# Altium PCB PCB3.PcbDoc (part 1 of 2)
Units mm, origin at the board's own origin, x right, y up, seen from the top; angles counter-clockwise.
Board outline 100 x 100 mm, 4 copper layers (Top Layer, Inner Top Layer, Inner Bottom Layer, Bottom Layer), stack 1.64 mm thick; 201 components, 196 nets, 716 pads, 122 vias.
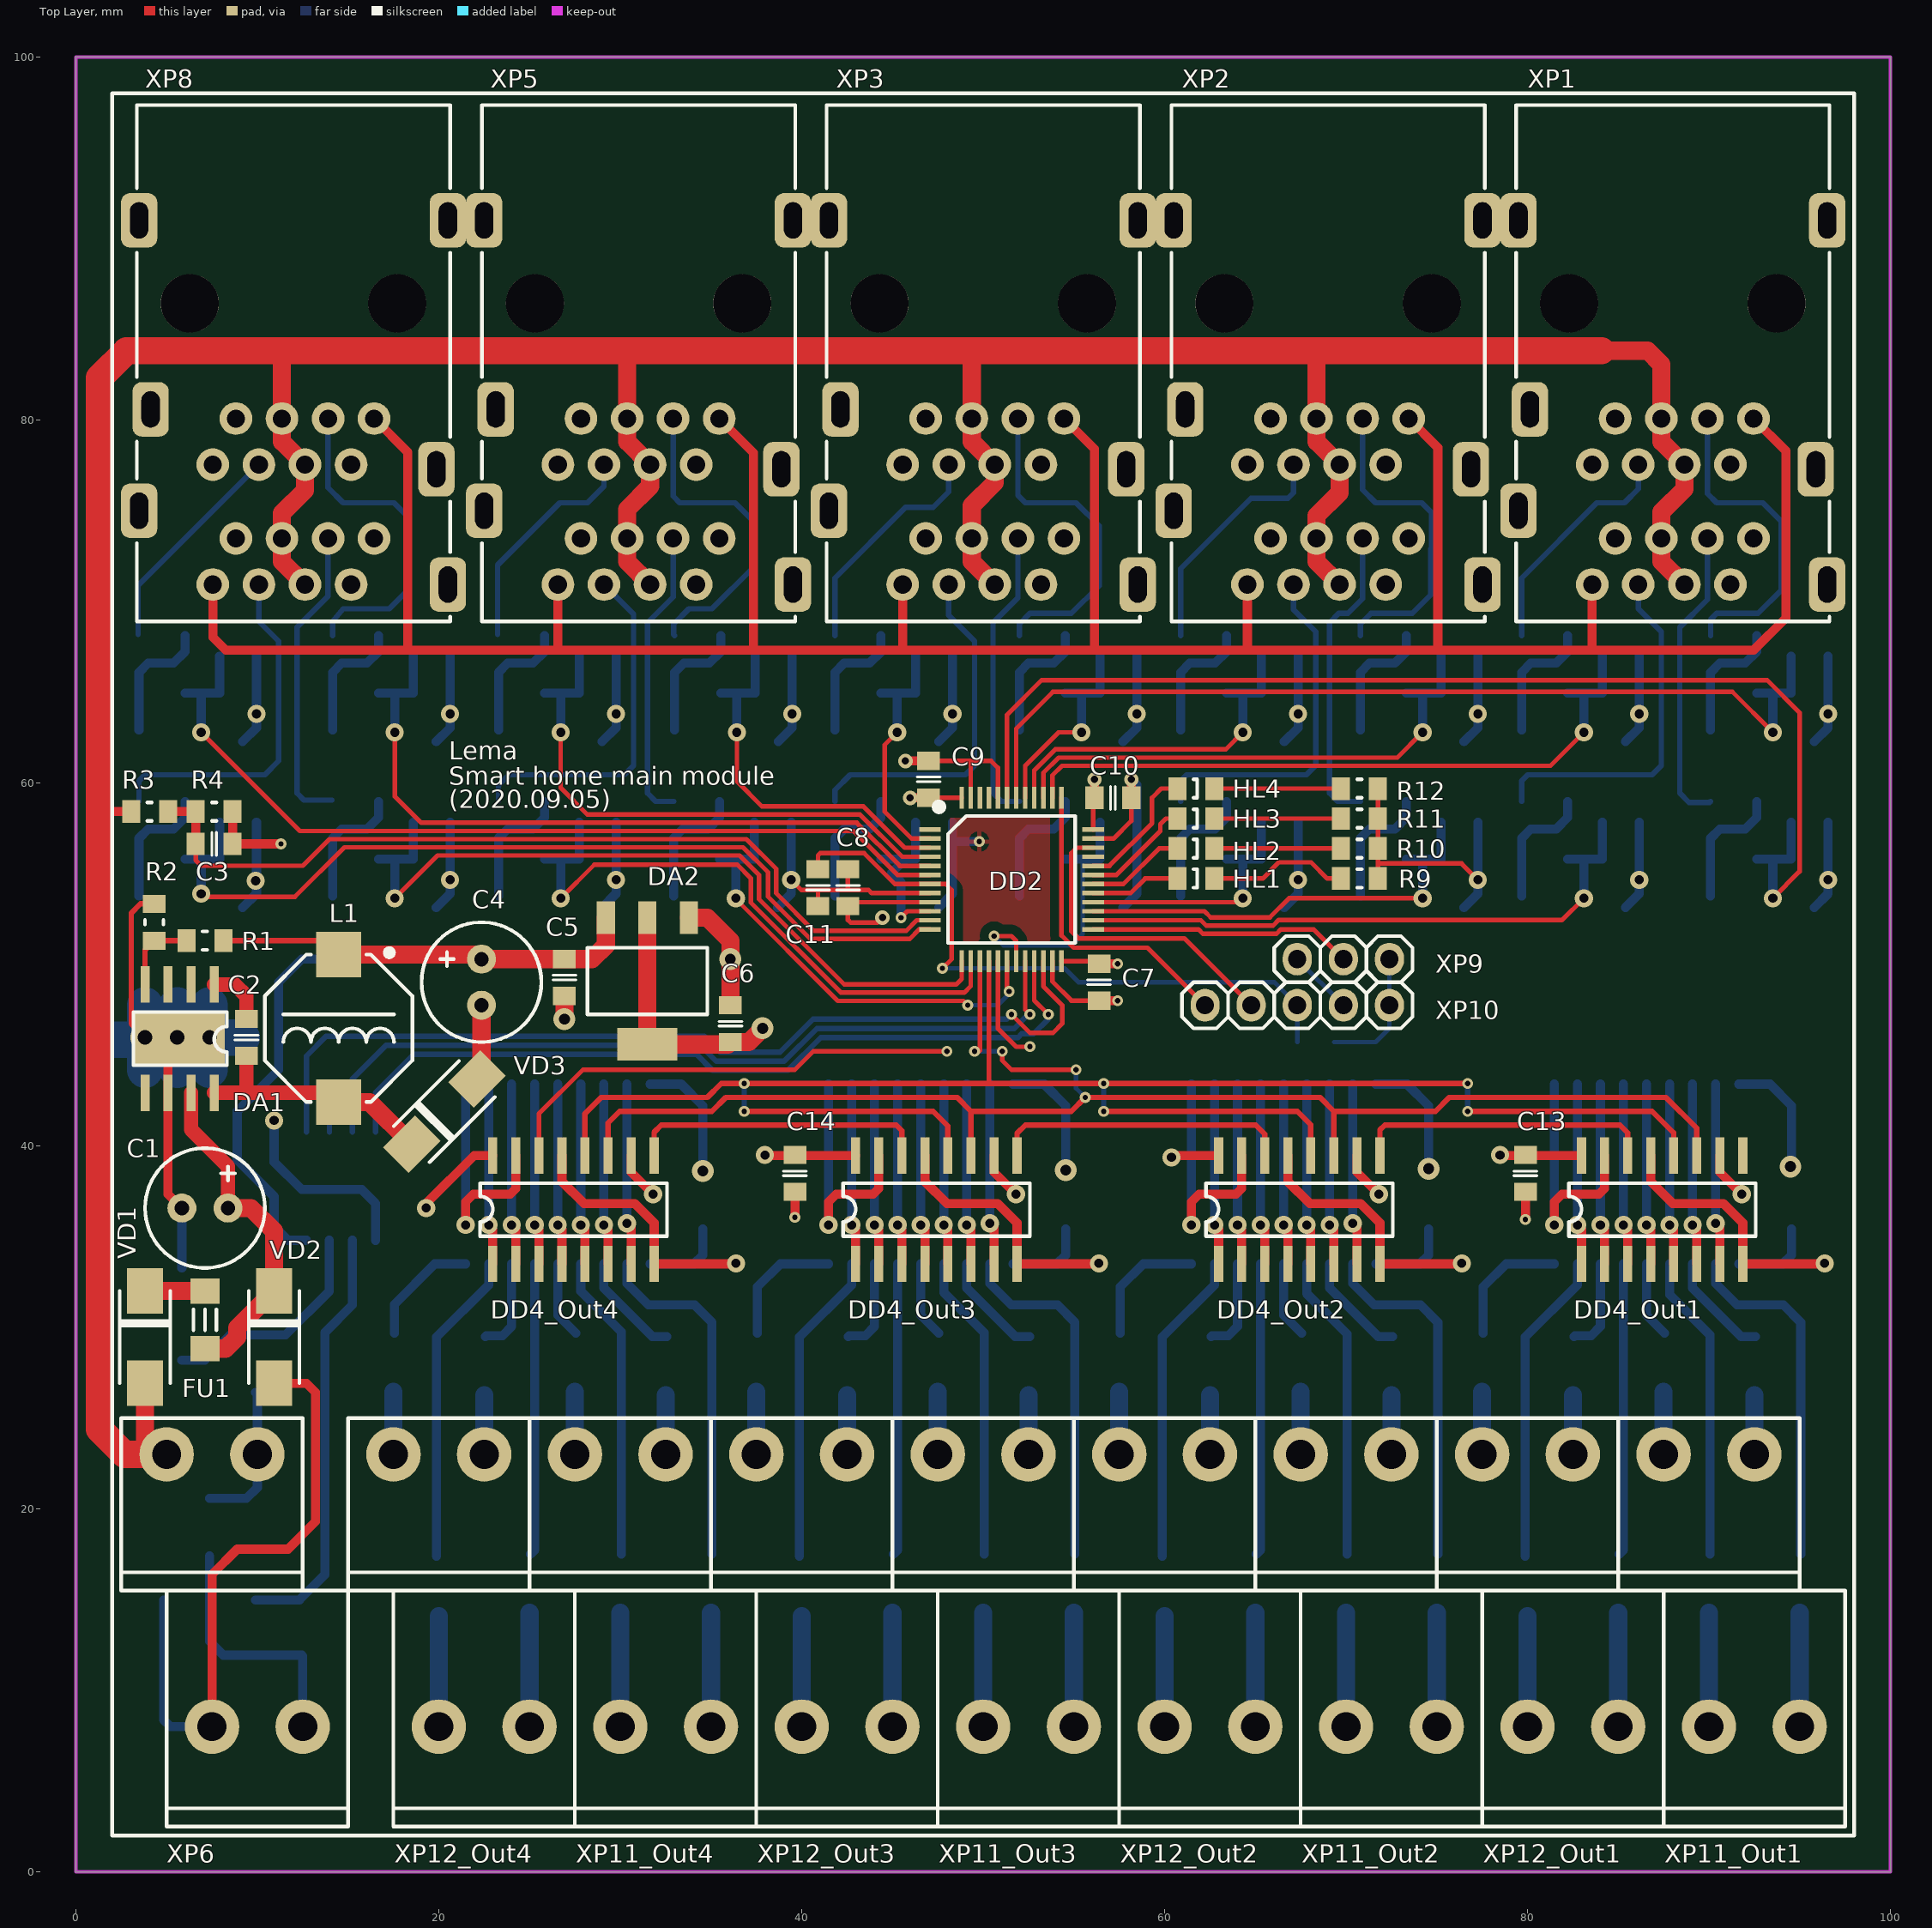
[diagram p0: Top Layer view]
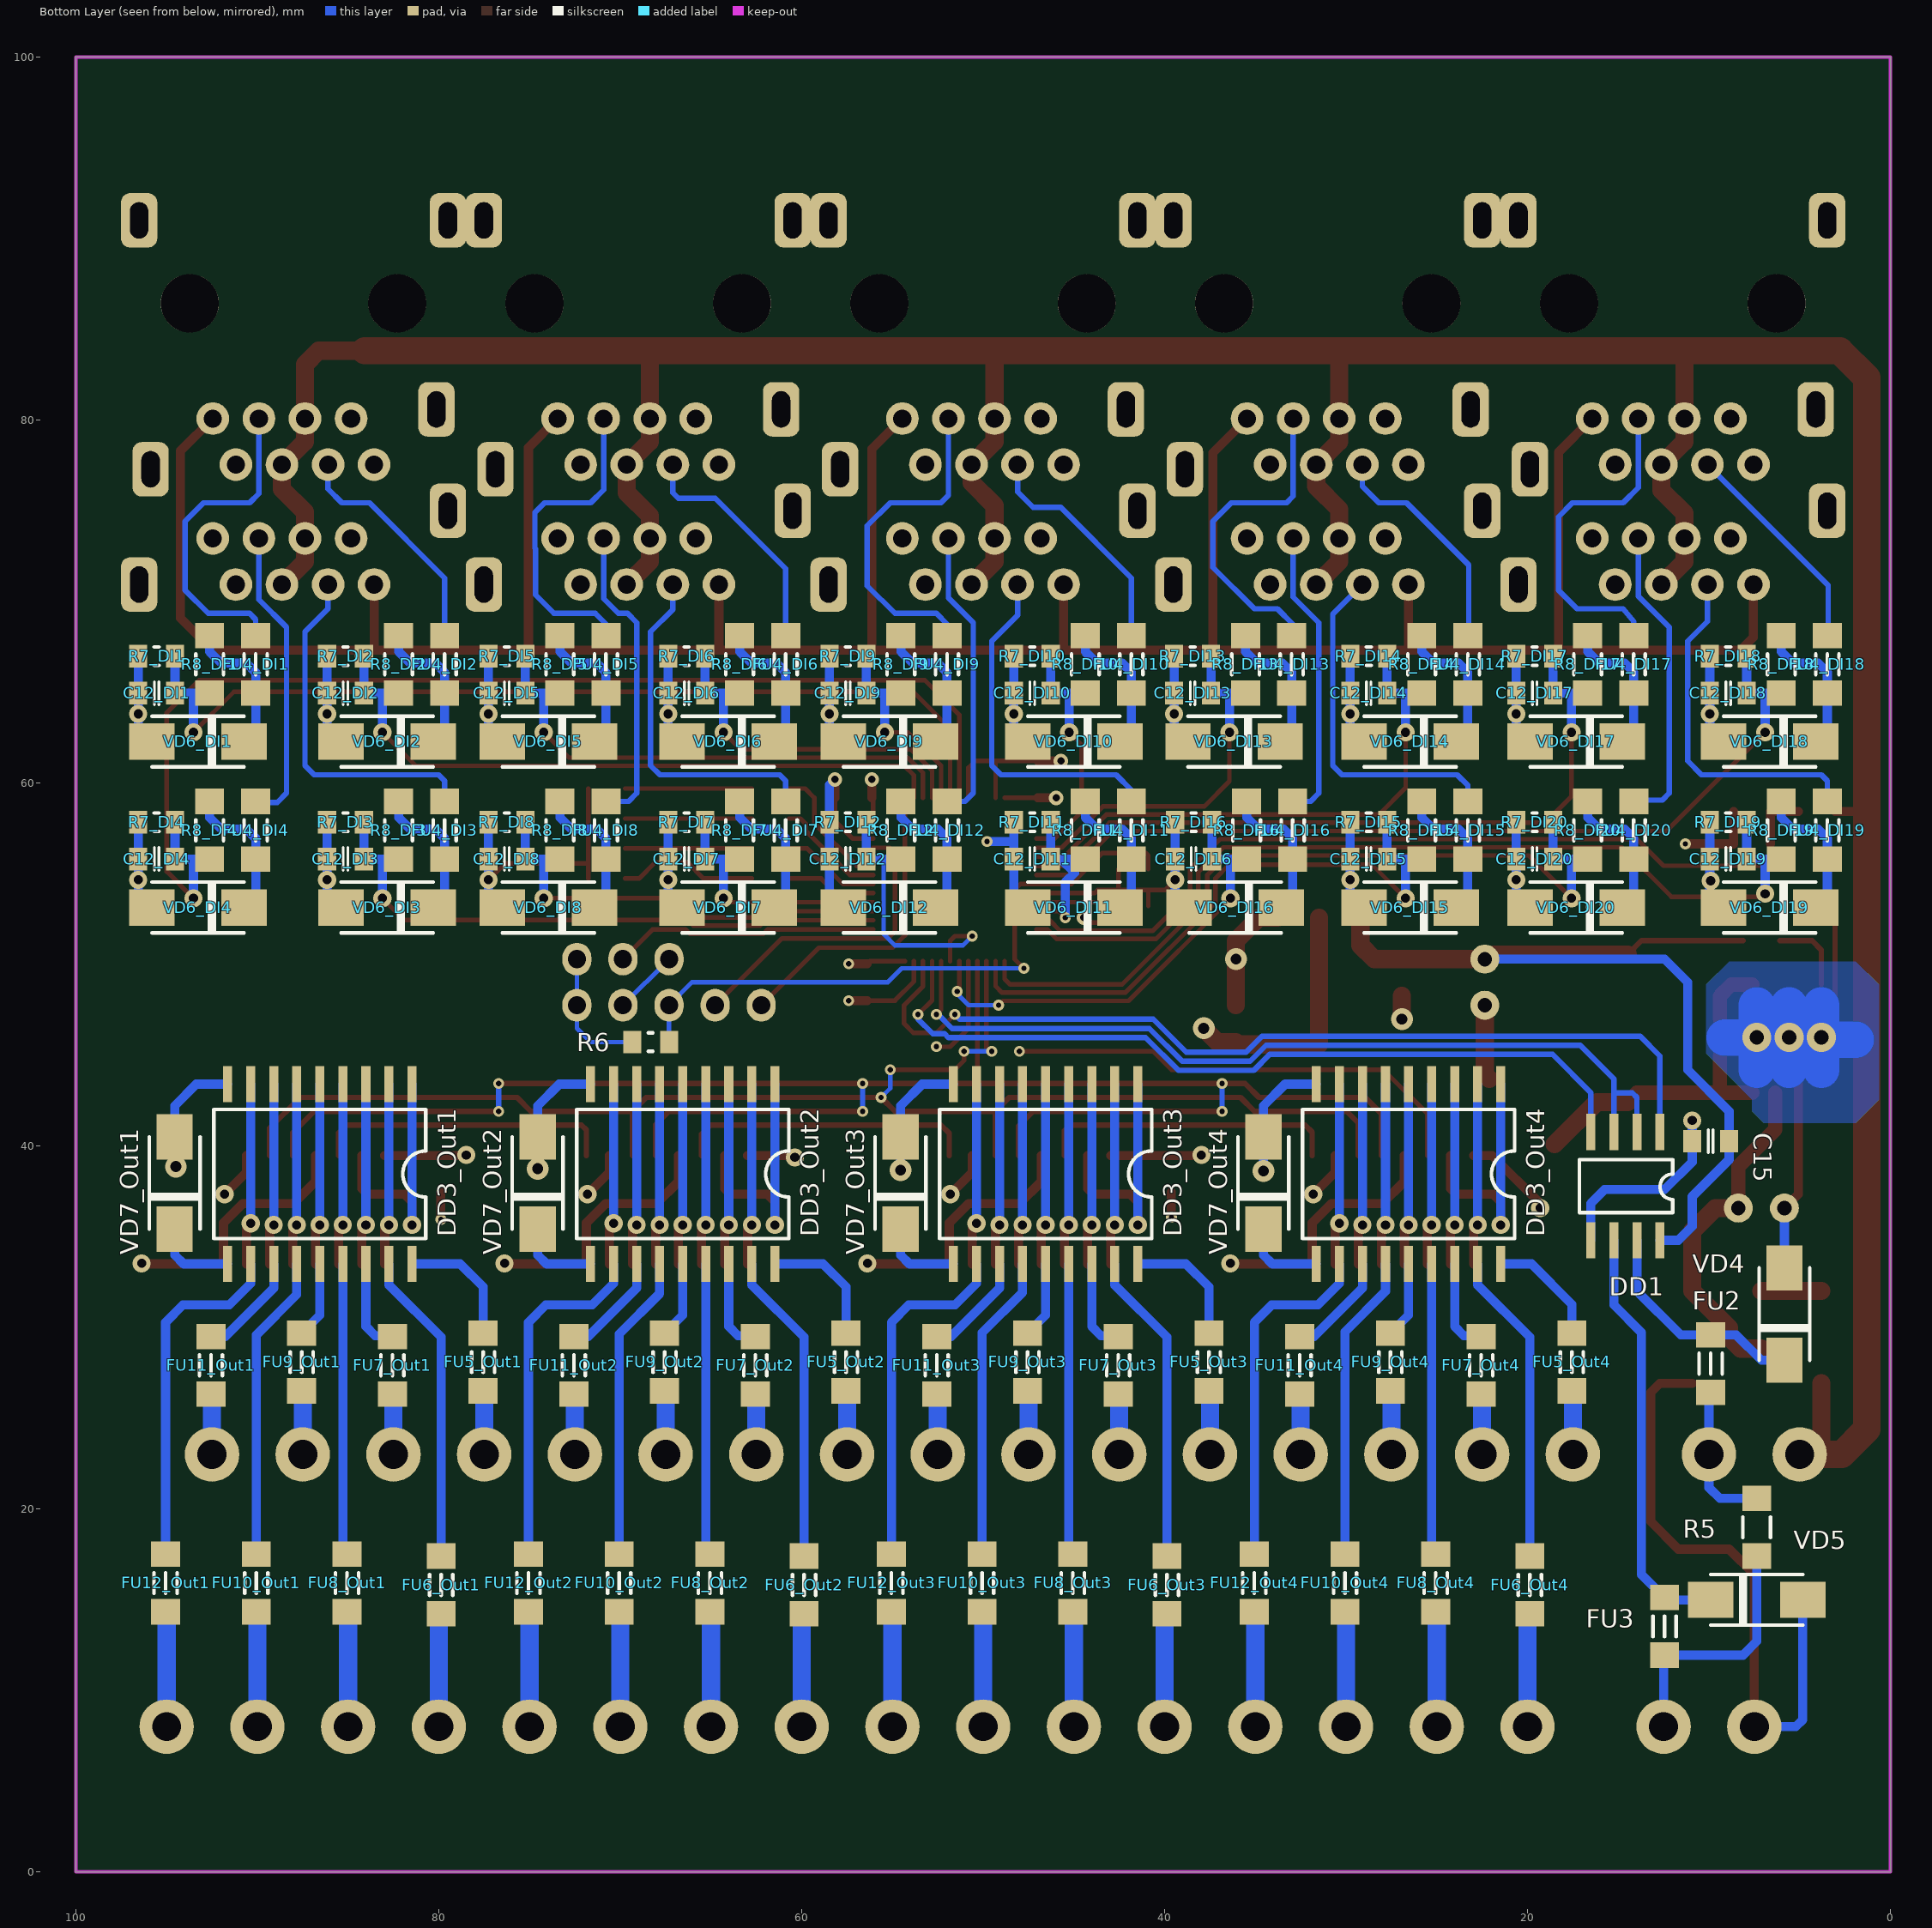
[diagram p1: Bottom Layer view, seen from below]
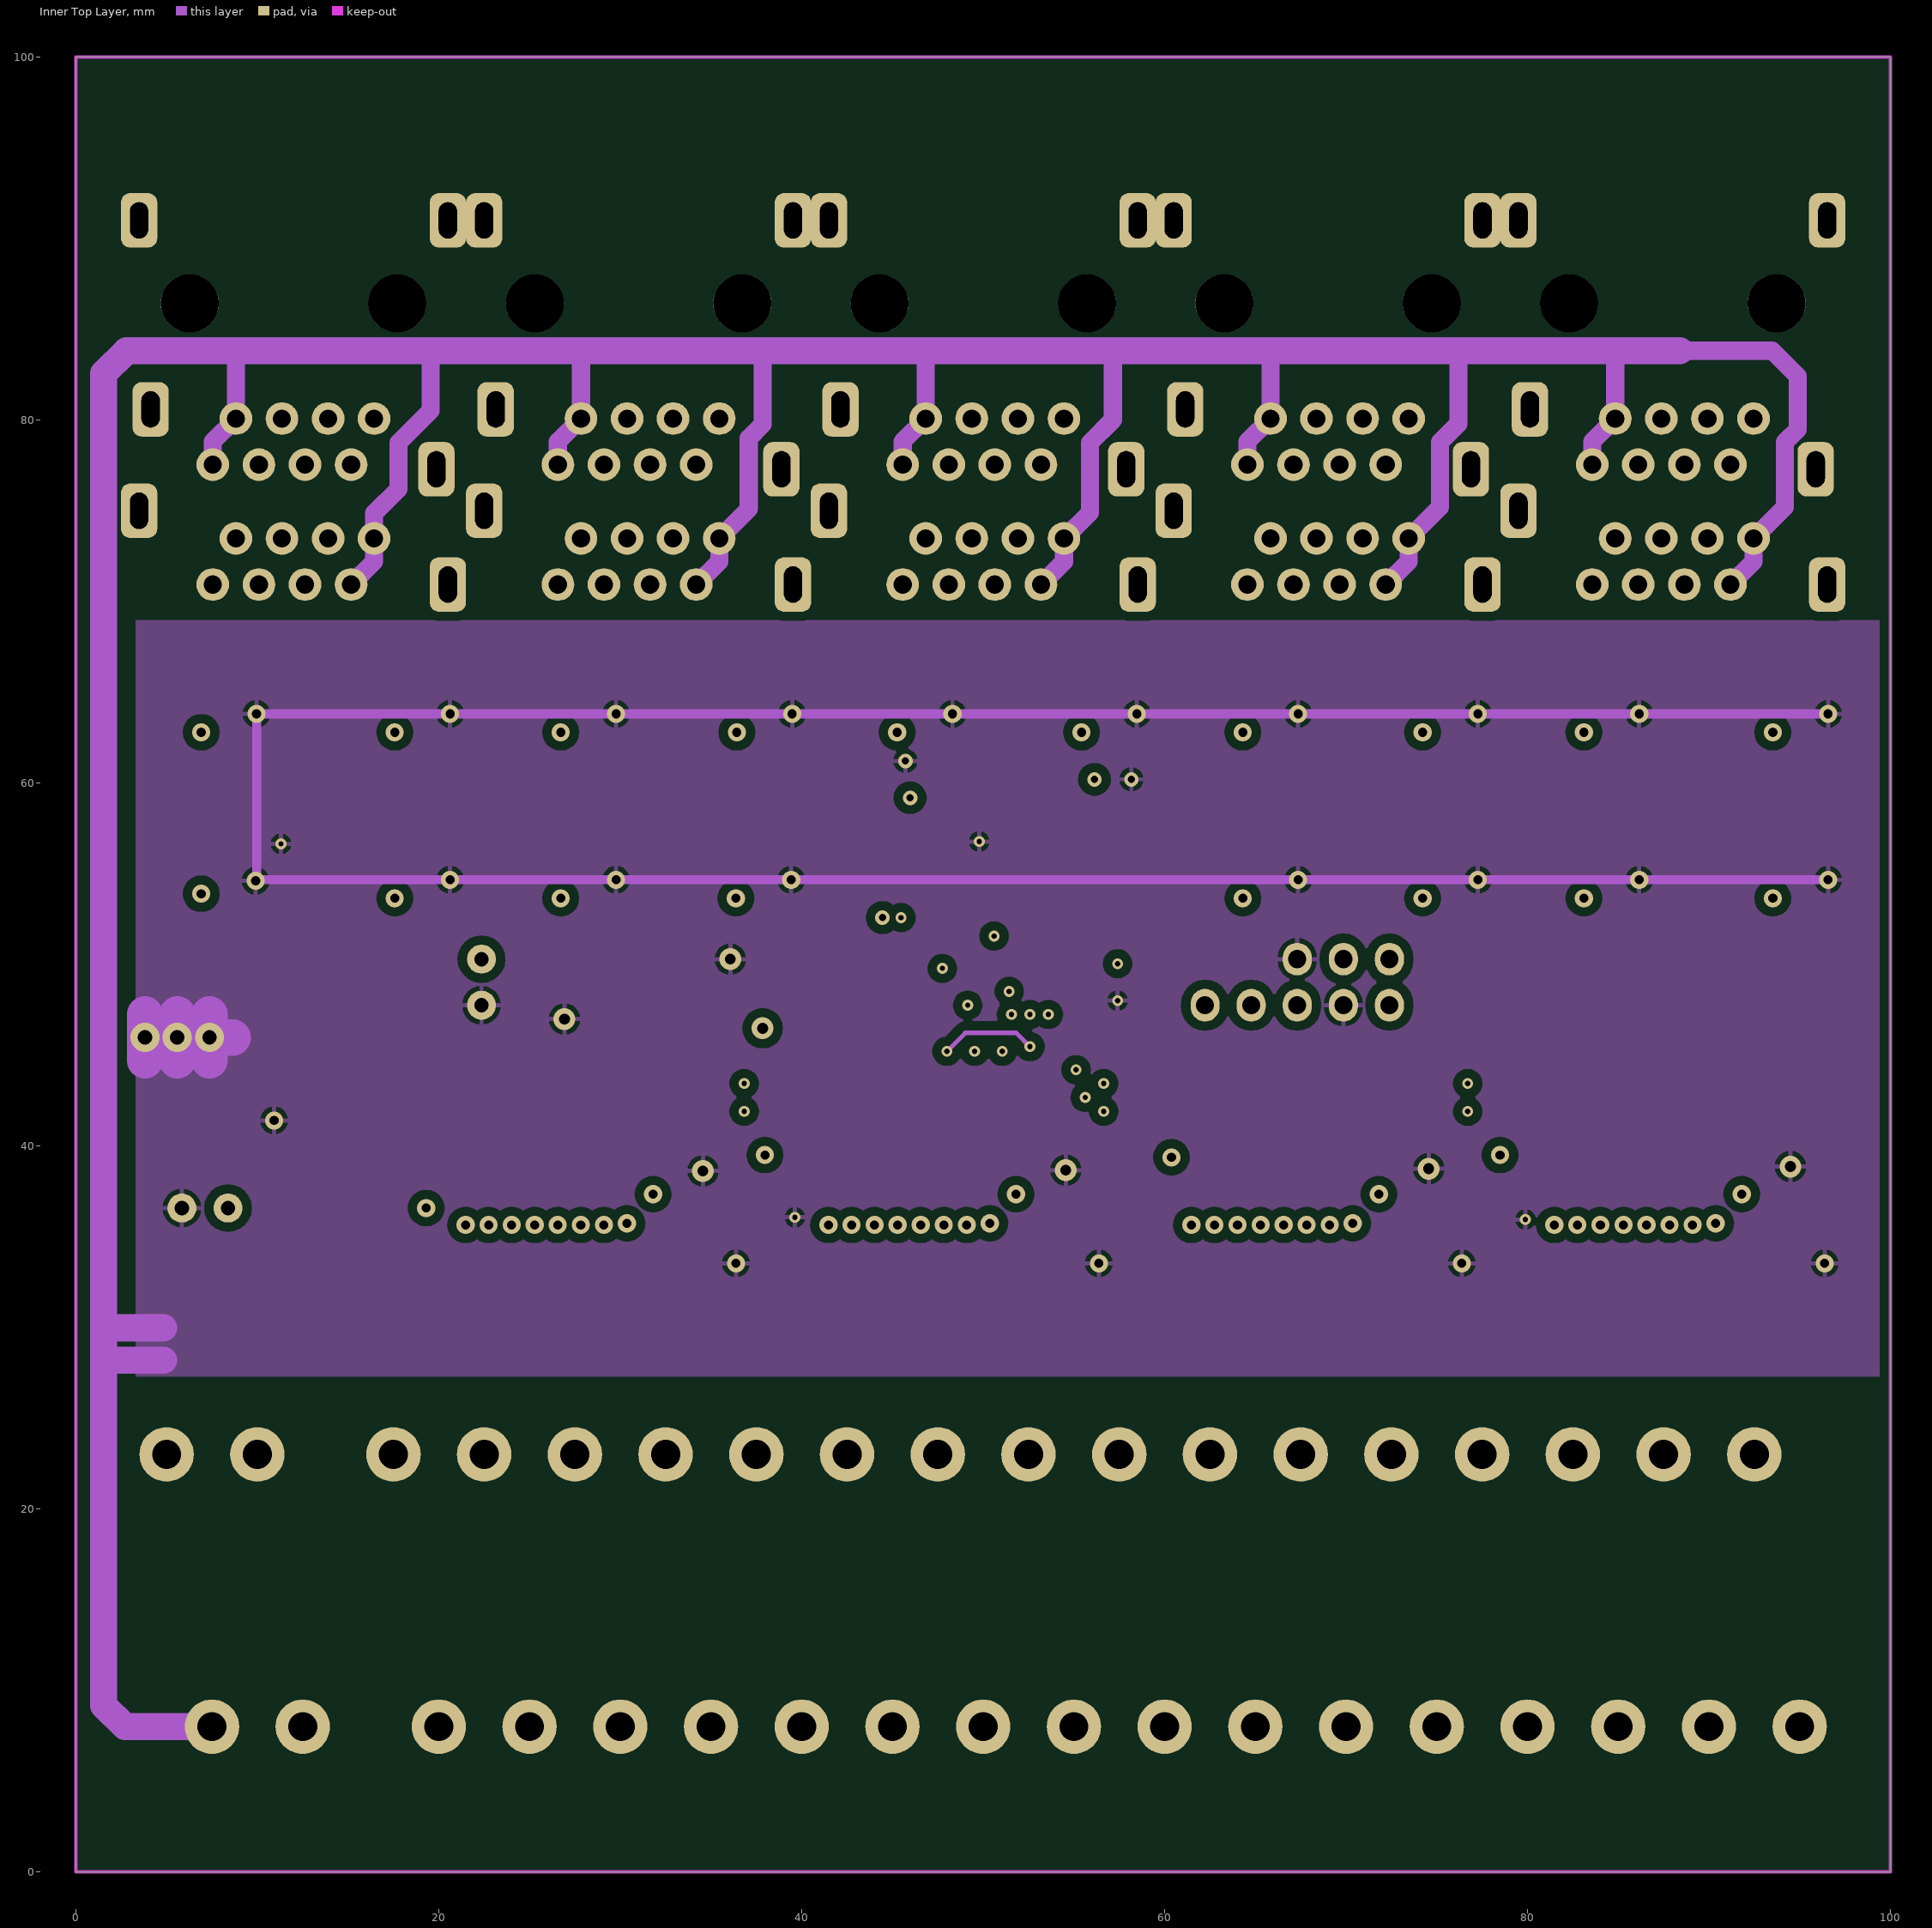
[diagram p2: Inner Top Layer]
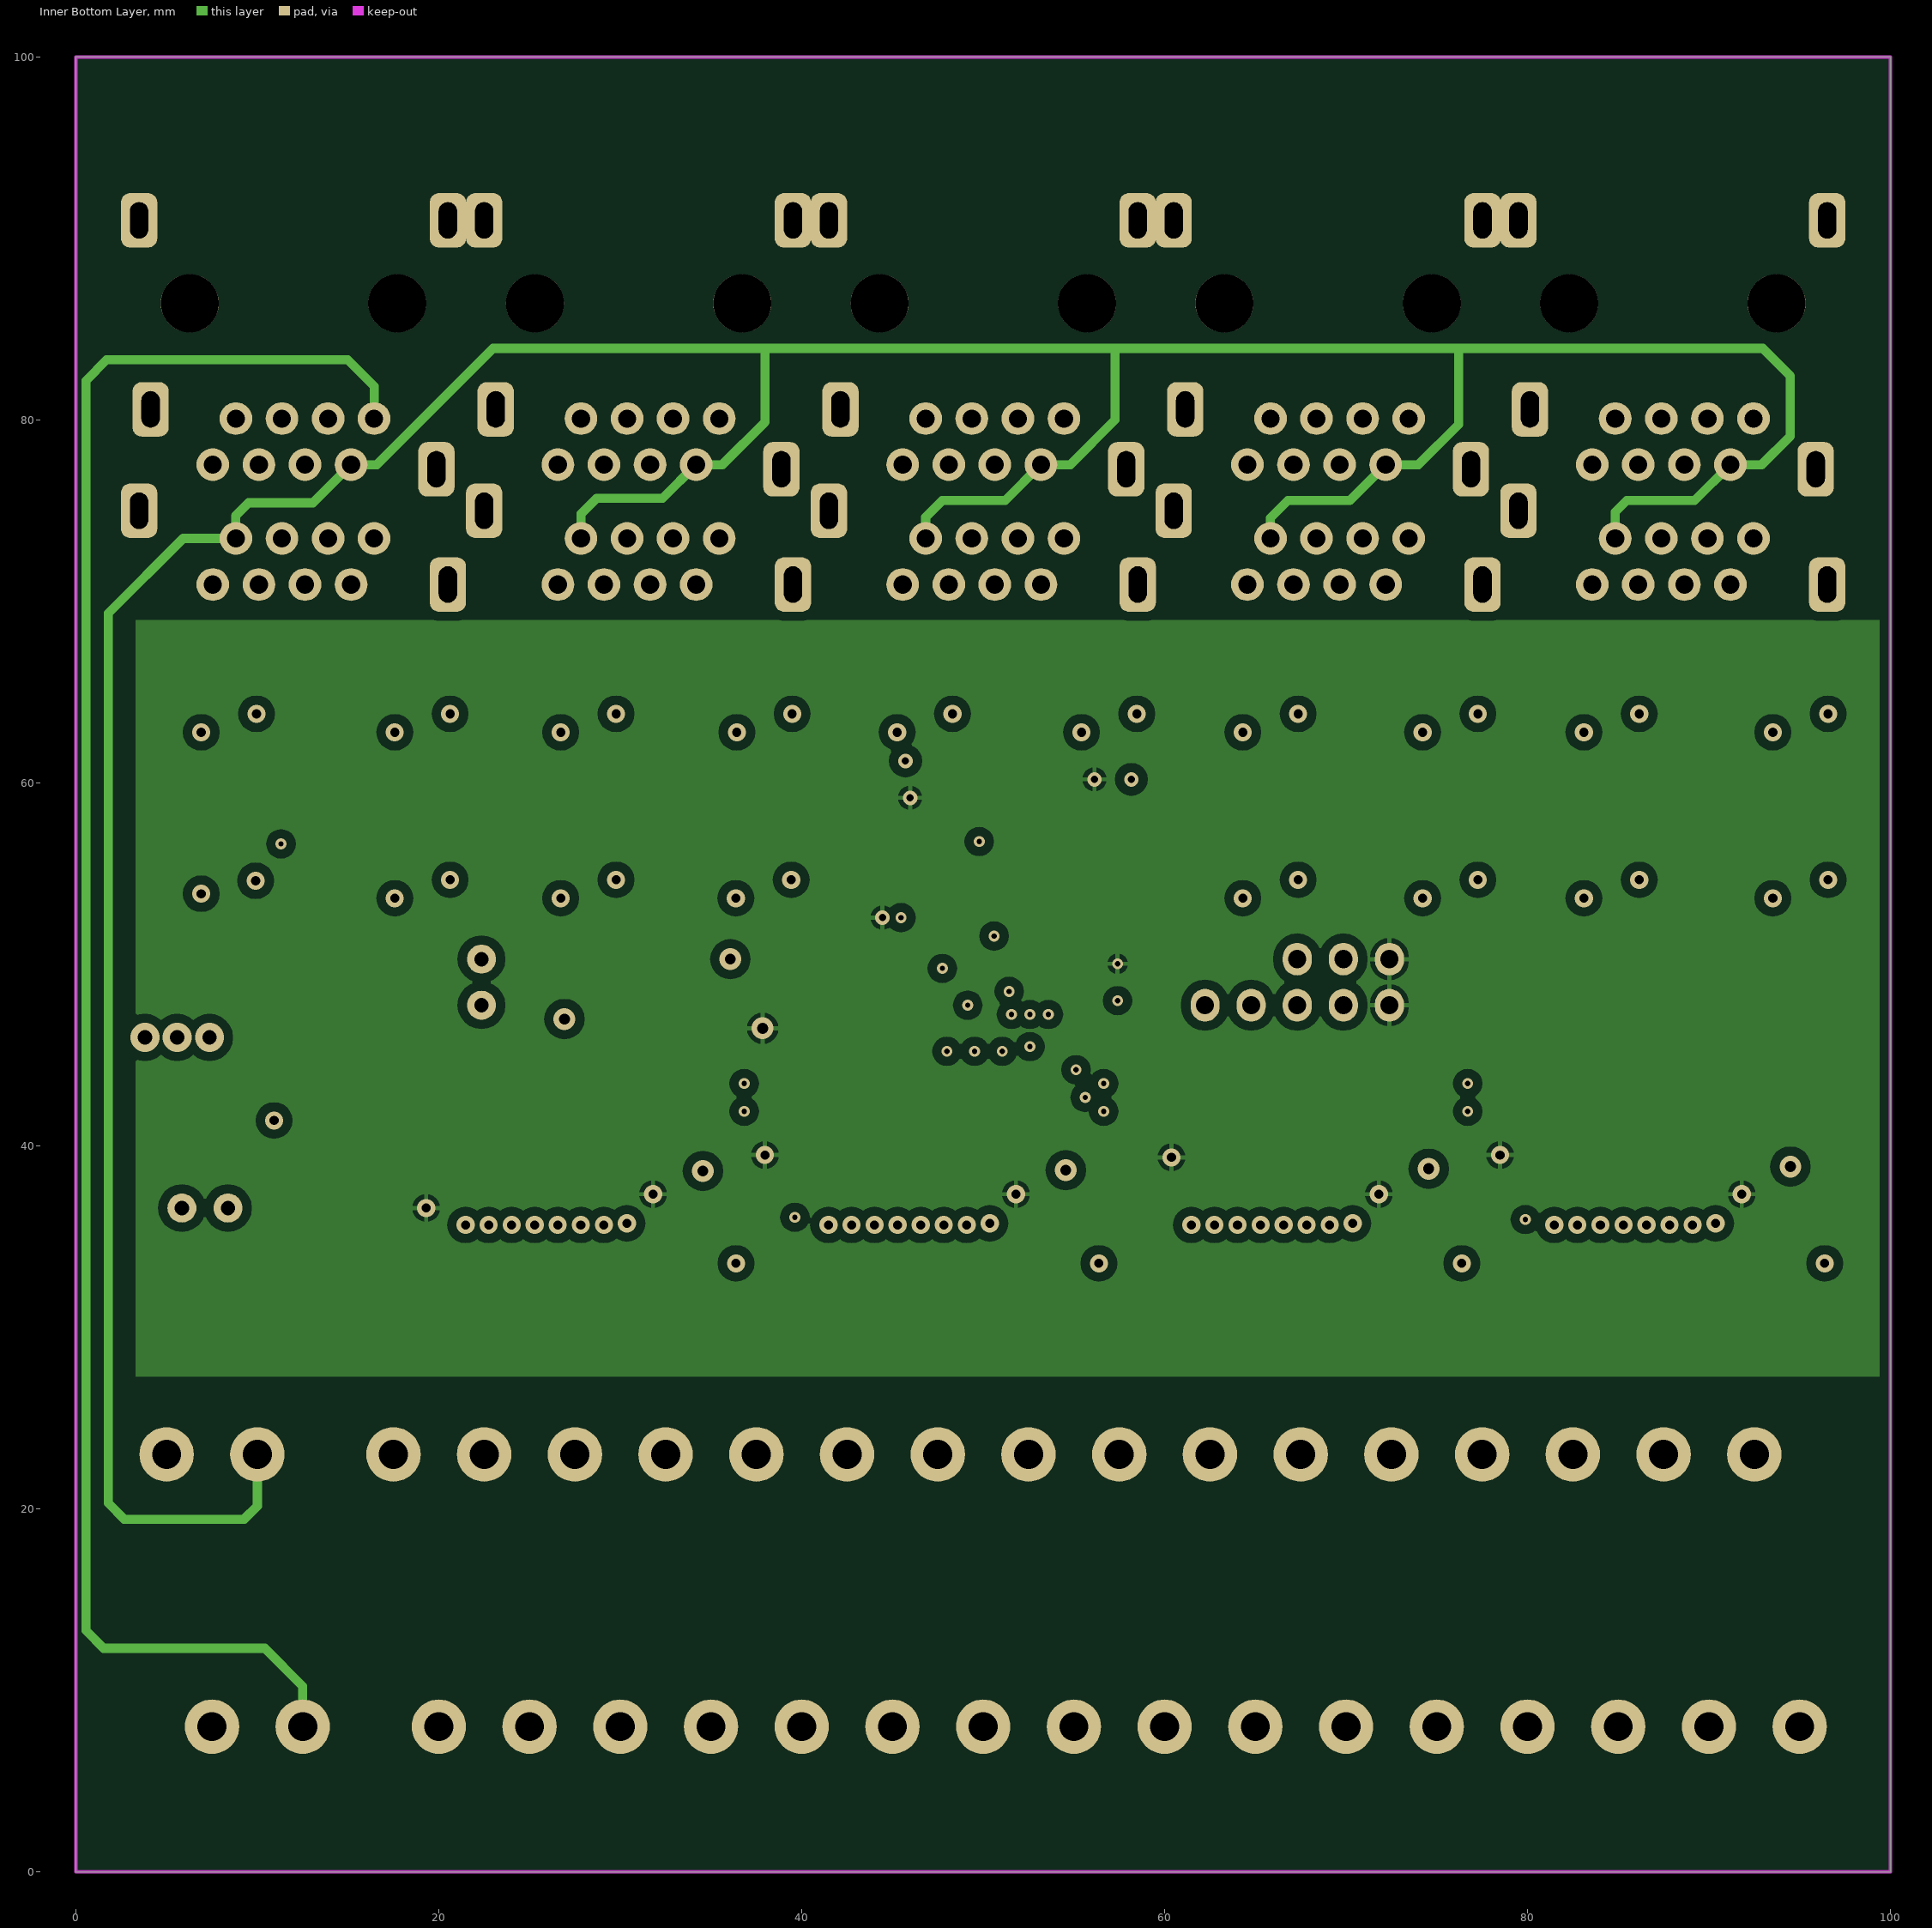
[diagram p3: Inner Bottom Layer]

## Layer stack, top to bottom
Top Solder: solder mask 0.0102, Solder Resist, Dk 3.5
Top Layer: signal copper 0.035
Dielectric 1: core 0.5, FR-4, Dk 4.2
Inner Top Layer: signal copper 0.035
Dielectric 4: prepreg 0.5, FR-4, Dk 4.2
Inner Bottom Layer: signal copper 0.035
Dielectric 3: core 0.5, FR-4, Dk 4.2
Bottom Layer: signal copper 0.035
Bottom Solder: solder mask 0.0102, Solder Resist, Dk 3.5

## Board outline
0,0 100,0 100,100 0,100

## Design rules (kind name [scope] priority, off if disabled: settings)
Clearance Clearance_1 [All vs InPolygon] p1: gap=0.5
Clearance [All] p2: gap=0.2
ComponentClearance [All] p1: gap=0 collisioncheckmode=3 verticalgap=0 showdistances=FALSE
Height [All] p1: minheight=0 maxheight=0 prefheight=0
HoleSize [All] p1: absolutevalues=TRUE maxlimit=11 minlimit=0.025 maxpercent=80.000 minpercent=20.000
HoleToHoleClearance [All] p1: gap=0.01 allowstackedmicrovias=TRUE
MinimumSolderMaskSliver [All] p1: minsoldermaskwidth=0.01
PolygonConnect [All] p1: connectstyle=Relief reliefconductorwidth=0.254 reliefentries=4 polygonreliefangle="90 Angle" airgapwidth=0.254
RoomDefinition DI18 [InComponentClass('DI18')] p1: confinementstyle=ConfineIn formatcopy=TRUE lockcomponents=FALSE outline 2.088,60.706 2.088,69.206 10.922,69.206 10.922,60.706
RoomDefinition DI13 [InComponentClass('DI13')] p2: confinementstyle=ConfineIn formatcopy=TRUE lockcomponents=FALSE outline 31.608,60.706 31.608,69.206 40.442,69.206 40.442,60.706
RoomDefinition Out3 [InComponentClass('Out3')] p3: confinementstyle=ConfineIn formatcopy=TRUE lockcomponents=FALSE outline 34.557,2.325 58.057,2.325 58.057,45 34.557,45
RoomDefinition Out4 [InComponentClass('Out4')] p4: confinementstyle=ConfineIn formatcopy=TRUE lockcomponents=FALSE outline 14.557,2.325 38.057,2.325 38.057,45 14.557,45
RoomDefinition Out2 [InComponentClass('Out2')] p5: confinementstyle=ConfineIn formatcopy=TRUE lockcomponents=FALSE outline 54.557,2.325 78.057,2.325 78.057,45 54.557,45
RoomDefinition DI1 [InComponentClass('DI1')] p6: confinementstyle=ConfineIn formatcopy=TRUE lockcomponents=FALSE outline 88.702,60.706 88.702,69.206 97.536,69.206 97.536,60.706
RoomDefinition DI2 [InComponentClass('DI2')] p7: confinementstyle=ConfineIn formatcopy=TRUE lockcomponents=FALSE outline 78.288,60.706 78.288,69.206 87.122,69.206 87.122,60.706
RoomDefinition DI3 [InComponentClass('DI3')] p8: confinementstyle=ConfineIn formatcopy=TRUE lockcomponents=FALSE outline 78.288,51.562 78.288,60.062 87.122,60.062 87.122,51.562
RoomDefinition DI8 [InComponentClass('DI8')] p9: confinementstyle=ConfineIn formatcopy=TRUE lockcomponents=FALSE outline 69.398,51.562 69.398,60.062 78.232,60.062 78.232,51.562
RoomDefinition DI7 [InComponentClass('DI7')] p10: confinementstyle=ConfineIn formatcopy=TRUE lockcomponents=FALSE outline 59.492,51.562 59.492,60.062 68.326,60.062 68.326,51.562
RoomDefinition DI6 [InComponentClass('DI6')] p11: confinementstyle=ConfineIn formatcopy=TRUE lockcomponents=FALSE outline 59.492,60.706 59.492,69.206 68.326,69.206 68.326,60.706
RoomDefinition DI5 [InComponentClass('DI5')] p12: confinementstyle=ConfineIn formatcopy=TRUE lockcomponents=FALSE outline 69.398,60.706 69.398,69.206 78.232,69.206 78.232,60.706
RoomDefinition DI4 [InComponentClass('DI4')] p13: confinementstyle=ConfineIn formatcopy=TRUE lockcomponents=FALSE outline 88.702,51.562 88.702,60.062 97.536,60.062 97.536,51.562
RoomDefinition DI9 [InComponentClass('DI9')] p14: confinementstyle=ConfineIn formatcopy=TRUE lockcomponents=FALSE outline 50.602,60.706 50.602,69.206 59.436,69.206 59.436,60.706
RoomDefinition DI10 [InComponentClass('DI10')] p15: confinementstyle=ConfineIn formatcopy=TRUE lockcomponents=FALSE outline 40.442,60.706 40.442,69.206 49.276,69.206 49.276,60.706
RoomDefinition DI11 [InComponentClass('DI11')] p16: confinementstyle=ConfineIn formatcopy=TRUE lockcomponents=FALSE outline 40.442,51.562 40.442,60.062 49.276,60.062 49.276,51.562
RoomDefinition DI12 [InComponentClass('DI12')] p17: confinementstyle=ConfineIn formatcopy=TRUE lockcomponents=FALSE outline 50.602,51.562 50.602,60.062 59.436,60.062 59.436,51.562
RoomDefinition DI15 [InComponentClass('DI15')] p18: confinementstyle=ConfineIn formatcopy=TRUE lockcomponents=FALSE outline 21.9,51.562 21.9,60.062 30.734,60.062 30.734,51.562
RoomDefinition DI16 [InComponentClass('DI16')] p19: confinementstyle=ConfineIn formatcopy=TRUE lockcomponents=FALSE outline 31.552,51.562 31.552,60.062 40.386,60.062 40.386,51.562
RoomDefinition DI19 [InComponentClass('DI19')] p20: confinementstyle=ConfineIn formatcopy=TRUE lockcomponents=FALSE outline 2.088,51.562 2.088,60.062 10.922,60.062 10.922,51.562
RoomDefinition DI20 [InComponentClass('DI20')] p21: confinementstyle=ConfineIn formatcopy=TRUE lockcomponents=FALSE outline 12.756,51.562 12.756,60.062 21.59,60.062 21.59,51.562
RoomDefinition DI17 [InComponentClass('DI17')] p22: confinementstyle=ConfineIn formatcopy=TRUE lockcomponents=FALSE outline 12.756,60.706 12.756,69.206 21.59,69.206 21.59,60.706
RoomDefinition DI14 [InComponentClass('DI14')] p23: confinementstyle=ConfineIn formatcopy=TRUE lockcomponents=FALSE outline 21.9,60.706 21.9,69.206 30.734,69.206 30.734,60.706
RoomDefinition Out1 [InComponentClass('Out1')] p24: confinementstyle=ConfineIn formatcopy=TRUE lockcomponents=FALSE outline 74.557,2.325 98.057,2.325 98.057,45 74.557,45
RoutingVias [All] p1: holewidth=0.5 width=1 viastyle="Through Hole" minholewidth=0.3 minwidth=0.6 maxholewidth=11 maxwidth=21
SilkToSilkClearance [All] p1: silktosilkclearance=0.01
SilkToSolderMaskClearance [IsPad] p1: minsilkscreentomaskgap=0.01 clearancetoexposedcopper=TRUE
SolderMaskExpansion [All] p1: expansion=0.102
UnpouredPolygon [All] p1: allowunpoured=FALSE
Width [All] p1: maxlimit=5 minlimit=0.2 preferedwidth=0.25
22 further rules are at their usual default settings.

## Classes and differential pairs
component class DI1: C12_DI1 FU4_DI1 R7_DI1 R8_DI1 VD6_DI1
component class DI2: C12_DI2 FU4_DI2 R7_DI2 R8_DI2 VD6_DI2
component class DI3: C12_DI3 FU4_DI3 R7_DI3 R8_DI3 VD6_DI3
component class DI4: C12_DI4 FU4_DI4 R7_DI4 R8_DI4 VD6_DI4
component class DI5: C12_DI5 FU4_DI5 R7_DI5 R8_DI5 VD6_DI5
component class DI6: C12_DI6 FU4_DI6 R7_DI6 R8_DI6 VD6_DI6
component class DI7: C12_DI7 FU4_DI7 R7_DI7 R8_DI7 VD6_DI7
component class DI8: C12_DI8 FU4_DI8 R7_DI8 R8_DI8 VD6_DI8
component class DI9: C12_DI9 FU4_DI9 R7_DI9 R8_DI9 VD6_DI9
component class DI10: C12_DI10 FU4_DI10 R7_DI10 R8_DI10 VD6_DI10
component class DI11: C12_DI11 FU4_DI11 R7_DI11 R8_DI11 VD6_DI11
component class DI12: C12_DI12 FU4_DI12 R7_DI12 R8_DI12 VD6_DI12
component class DI13: C12_DI13 FU4_DI13 R7_DI13 R8_DI13 VD6_DI13
component class DI14: C12_DI14 FU4_DI14 R7_DI14 R8_DI14 VD6_DI14
component class DI15: C12_DI15 FU4_DI15 R7_DI15 R8_DI15 VD6_DI15
component class DI16: C12_DI16 FU4_DI16 R7_DI16 R8_DI16 VD6_DI16
component class DI17: C12_DI17 FU4_DI17 R7_DI17 R8_DI17 VD6_DI17
component class DI18: C12_DI18 FU4_DI18 R7_DI18 R8_DI18 VD6_DI18
component class DI19: C12_DI19 FU4_DI19 R7_DI19 R8_DI19 VD6_DI19
component class DI20: C12_DI20 FU4_DI20 R7_DI20 R8_DI20 VD6_DI20
component class Out1: DD3_Out1 DD4_Out1 FU5_Out1 FU6_Out1 FU7_Out1 FU8_Out1 FU9_Out1 FU10_Out1 FU11_Out1 FU12_Out1 VD7_Out1 XP11_Out1 XP12_Out1
component class Out2: DD3_Out2 DD4_Out2 FU5_Out2 FU6_Out2 FU7_Out2 FU8_Out2 FU9_Out2 FU10_Out2 FU11_Out2 FU12_Out2 VD7_Out2 XP11_Out2 XP12_Out2
component class Out3: DD3_Out3 DD4_Out3 FU5_Out3 FU6_Out3 FU7_Out3 FU8_Out3 FU9_Out3 FU10_Out3 FU11_Out3 FU12_Out3 VD7_Out3 XP11_Out3 XP12_Out3
component class Out4: DD3_Out4 DD4_Out4 FU5_Out4 FU6_Out4 FU7_Out4 FU8_Out4 FU9_Out4 FU10_Out4 FU11_Out4 FU12_Out4 VD7_Out4 XP11_Out4 XP12_Out4
component class Sheet1: C1 C2 C3 C4 C5 C6 C7 C8 C9 C10 C11 C13 C14 C15 DA1 DA2 DD1 DD2 FU1 FU2 FU3 HL1 HL2 HL3 HL4 L1 R1 R2 R3 R4 R5 R6 R9 R10 R11 R12 VD1 VD2 VD3 VD4 VD5 XP1 XP2 XP3 XP5 XP6 XP8 XP9 XP10
net class DI_[1..20]: DI_1 DI_2 DI_3 DI_4 DI_5 DI_6 DI_7 DI_8 DI_9 DI_10 DI_11 DI_12 DI_13 DI_14 DI_15 DI_16 DI_17 DI_18 DI_19 DI_20
net class DI_MCU_[1..20]: DI_MCU_1 DI_MCU_2 DI_MCU_3 DI_MCU_4 DI_MCU_5 DI_MCU_6 DI_MCU_7 DI_MCU_8 DI_MCU_9 DI_MCU_10 DI_MCU_11 DI_MCU_12 DI_MCU_13 DI_MCU_14 DI_MCU_15 DI_MCU_16 DI_MCU_17 DI_MCU_18 DI_MCU_19 DI_MCU_20
channel class Sheet3: DI1 DI2 DI3 DI4 DI5 DI6 DI7 DI8 DI9 DI10 DI11 DI12 DI13 DI14 DI15 DI16 DI17 DI18 DI19 DI20
channel class Sheet4: Out1 Out2 Out3 Out4

## Components (designator, comment, footprint, x,y, rotation, side; value= is the part's Value field where it differs from the comment)
C1 "100u 35V" "Cap electro d6.3x2.54mm" 5.842,36.576 r0 top
C2 "10n" "Cap Ceramic 0805" 9.398,46.99 r270 top
C3 "100n" "Cap Ceramic 0805" 8.636,56.642 r180 top
C4 "100u 10V" "Cap electro d6.3x2.54mm" 22.352,47.752 r90 top
C5 "1u" "Cap Ceramic 0805" 26.924,48.26 r90 top
C6 "1u" "Cap Ceramic 0805" 36.068,47.752 r270 top
C7 "100n" "Cap Ceramic 0805" 56.388,48.006 r90 top
C8 "100n" "Cap Ceramic 0805" 42.545,55.245 r270 top
C9 "100n" "Cap Ceramic 0805" 46.99,61.214 r270 top
C10 "100n" "Cap Ceramic 0805" 58.166,59.182 r180 top
C11 "100n" "Cap Ceramic 0805" 40.894,53.213 r90 top
C12_DI1 "100n" "Cap Ceramic 0805" 94.536,64.95 r0 bottom (schematic designator C12)
C12_DI2 "100n" "Cap Ceramic 0805" 84.122,64.95 r0 bottom (schematic designator C12)
C12_DI3 "100n" "Cap Ceramic 0805" 84.122,55.806 r0 bottom (schematic designator C12)
C12_DI4 "100n" "Cap Ceramic 0805" 94.536,55.806 r0 bottom (schematic designator C12)
C12_DI5 "100n" "Cap Ceramic 0805" 75.232,64.95 r0 bottom (schematic designator C12)
C12_DI6 "100n" "Cap Ceramic 0805" 65.326,64.95 r0 bottom (schematic designator C12)
C12_DI7 "100n" "Cap Ceramic 0805" 65.326,55.806 r0 bottom (schematic designator C12)
C12_DI8 "100n" "Cap Ceramic 0805" 75.232,55.806 r0 bottom (schematic designator C12)
C12_DI9 "100n" "Cap Ceramic 0805" 56.436,64.95 r0 bottom (schematic designator C12)
C12_DI10 "100n" "Cap Ceramic 0805" 46.276,64.95 r0 bottom (schematic designator C12)
C12_DI11 "100n" "Cap Ceramic 0805" 46.276,55.806 r0 bottom (schematic designator C12)
C12_DI12 "100n" "Cap Ceramic 0805" 56.436,55.806 r0 bottom (schematic designator C12)
C12_DI13 "100n" "Cap Ceramic 0805" 37.442,64.95 r0 bottom (schematic designator C12)
C12_DI14 "100n" "Cap Ceramic 0805" 27.734,64.95 r0 bottom (schematic designator C12)
C12_DI15 "100n" "Cap Ceramic 0805" 27.734,55.806 r0 bottom (schematic designator C12)
C12_DI16 "100n" "Cap Ceramic 0805" 37.386,55.806 r0 bottom (schematic designator C12)
C12_DI17 "100n" "Cap Ceramic 0805" 18.59,64.95 r0 bottom (schematic designator C12)
C12_DI18 "100n" "Cap Ceramic 0805" 7.922,64.95 r0 bottom (schematic designator C12)
C12_DI19 "100n" "Cap Ceramic 0805" 7.922,55.806 r0 bottom (schematic designator C12)
C12_DI20 "100n" "Cap Ceramic 0805" 18.59,55.806 r0 bottom (schematic designator C12)
C13 "100n" "Cap Ceramic 0805" 79.883,37.465 r90 top
C14 "100n" "Cap Ceramic 0805" 39.624,37.465 r90 top
C15 "100n" "Cap Ceramic 0805" 10.922,40.259 r180 bottom
DA1 "TPS5430" "SO8 S1.27W6.00 GP" 7.62,48.895 r270 top
DA2 "LM1117IMP-3.3" SOT-232 33.782,52.578 r180 top
DD1 "ADM485" "SO8 S1.27W6.00" 12.7,40.767 r270 bottom
DD2 "STM32F103CBT6" "TQFP48 S0.5" 47.066,57.682 r0 top
DD3_Out1 "ULN2803" "SO18 S1.27W9.9" 81.477,43.406 r270 bottom (schematic designator DD3)
DD3_Out2 "ULN2803" "SO18 S1.27W9.9" 61.477,43.406 r270 bottom (schematic designator DD3)
DD3_Out3 "ULN2803" "SO18 S1.27W9.9" 41.477,43.406 r270 bottom (schematic designator DD3)
DD3_Out4 "ULN2803" "SO18 S1.27W9.9" 21.477,43.406 r270 bottom (schematic designator DD3)
DD4_Out1 "74НС595" "SO16 S1.27W6.00" 82.977,33.5 r90 top (schematic designator DD4)
DD4_Out2 "74НС595" "SO16 S1.27W6.00" 62.977,33.5 r90 top (schematic designator DD4)
DD4_Out3 "74НС595" "SO16 S1.27W6.00" 42.977,33.5 r90 top (schematic designator DD4)
DD4_Out4 "74НС595" "SO16 S1.27W6.00" 22.977,33.5 r90 top (schematic designator DD4)
FU1 "FSMD010-1206" "Fuse 1206" 7.112,32.004 r270 top
FU2 "FSMD010-1206" "Fuse 1206" 9.906,26.416 r90 bottom
FU3 "FSMD010-1206" "Fuse 1206" 12.446,11.938 r90 bottom
FU4_DI1 "FSMD005-1206" "Fuse 1206" 90.091,68.125 r270 bottom (schematic designator FU4)
FU4_DI2 "FSMD005-1206" "Fuse 1206" 79.677,68.125 r270 bottom (schematic designator FU4)
FU4_DI3 "FSMD005-1206" "Fuse 1206" 79.677,58.981 r270 bottom (schematic designator FU4)
FU4_DI4 "FSMD005-1206" "Fuse 1206" 90.091,58.981 r270 bottom (schematic designator FU4)
FU4_DI5 "FSMD005-1206" "Fuse 1206" 70.787,68.125 r270 bottom (schematic designator FU4)
FU4_DI6 "FSMD005-1206" "Fuse 1206" 60.881,68.125 r270 bottom (schematic designator FU4)
FU4_DI7 "FSMD005-1206" "Fuse 1206" 60.881,58.981 r270 bottom (schematic designator FU4)
FU4_DI8 "FSMD005-1206" "Fuse 1206" 70.787,58.981 r270 bottom (schematic designator FU4)
FU4_DI9 "FSMD005-1206" "Fuse 1206" 51.991,68.125 r270 bottom (schematic designator FU4)
FU4_DI10 "FSMD005-1206" "Fuse 1206" 41.831,68.125 r270 bottom (schematic designator FU4)
FU4_DI11 "FSMD005-1206" "Fuse 1206" 41.831,58.981 r270 bottom (schematic designator FU4)
FU4_DI12 "FSMD005-1206" "Fuse 1206" 51.991,58.981 r270 bottom (schematic designator FU4)
FU4_DI13 "FSMD005-1206" "Fuse 1206" 32.997,68.125 r270 bottom (schematic designator FU4)
FU4_DI14 "FSMD005-1206" "Fuse 1206" 23.289,68.125 r270 bottom (schematic designator FU4)
FU4_DI15 "FSMD005-1206" "Fuse 1206" 23.289,58.981 r270 bottom (schematic designator FU4)
FU4_DI16 "FSMD005-1206" "Fuse 1206" 32.941,58.981 r270 bottom (schematic designator FU4)
FU4_DI17 "FSMD005-1206" "Fuse 1206" 14.145,68.125 r270 bottom (schematic designator FU4)
FU4_DI18 "FSMD005-1206" "Fuse 1206" 3.477,68.125 r270 bottom (schematic designator FU4)
FU4_DI19 "FSMD005-1206" "Fuse 1206" 3.477,58.981 r270 bottom (schematic designator FU4)
FU4_DI20 "FSMD005-1206" "Fuse 1206" 14.145,58.981 r270 bottom (schematic designator FU4)
FU5_Out1 "FSMD010-1206" "Fuse 1206" 77.557,26.5 r90 bottom (schematic designator FU5)
FU5_Out2 "FSMD010-1206" "Fuse 1206" 57.557,26.5 r90 bottom (schematic designator FU5)
FU5_Out3 "FSMD010-1206" "Fuse 1206" 37.557,26.5 r90 bottom (schematic designator FU5)
FU5_Out4 "FSMD010-1206" "Fuse 1206" 17.557,26.5 r90 bottom (schematic designator FU5)
FU6_Out1 "FSMDxxx-1206" "Fuse 1206" 79.869,14.224 r90 bottom (schematic designator FU6)
FU6_Out2 "FSMDxxx-1206" "Fuse 1206" 59.869,14.224 r90 bottom (schematic designator FU6)
FU6_Out3 "FSMDxxx-1206" "Fuse 1206" 39.869,14.224 r90 bottom (schematic designator FU6)
FU6_Out4 "FSMDxxx-1206" "Fuse 1206" 19.869,14.224 r90 bottom (schematic designator FU6)
FU7_Out1 "FSMDxxx-1206" "Fuse 1206" 82.557,26.325 r90 bottom (schematic designator FU7)
FU7_Out2 "FSMDxxx-1206" "Fuse 1206" 62.557,26.325 r90 bottom (schematic designator FU7)
FU7_Out3 "FSMDxxx-1206" "Fuse 1206" 42.557,26.325 r90 bottom (schematic designator FU7)
FU7_Out4 "FSMDxxx-1206" "Fuse 1206" 22.557,26.325 r90 bottom (schematic designator FU7)
FU8_Out1 "FSMDxxx-1206" "Fuse 1206" 85.057,14.325 r90 bottom (schematic designator FU8)
FU8_Out2 "FSMDxxx-1206" "Fuse 1206" 65.057,14.325 r90 bottom (schematic designator FU8)
FU8_Out3 "FSMDxxx-1206" "Fuse 1206" 45.057,14.325 r90 bottom (schematic designator FU8)
FU8_Out4 "FSMDxxx-1206" "Fuse 1206" 25.057,14.325 r90 bottom (schematic designator FU8)
FU9_Out1 "FSMD010-1206" "Fuse 1206" 87.557,26.5 r90 bottom (schematic designator FU9)
FU9_Out2 "FSMD010-1206" "Fuse 1206" 67.557,26.5 r90 bottom (schematic designator FU9)
FU9_Out3 "FSMD010-1206" "Fuse 1206" 47.557,26.5 r90 bottom (schematic designator FU9)
FU9_Out4 "FSMD010-1206" "Fuse 1206" 27.557,26.5 r90 bottom (schematic designator FU9)
FU10_Out1 "FSMDxxx-1206" "Fuse 1206" 90.057,14.325 r90 bottom (schematic designator FU10)
FU10_Out2 "FSMDxxx-1206" "Fuse 1206" 70.057,14.325 r90 bottom (schematic designator FU10)
FU10_Out3 "FSMDxxx-1206" "Fuse 1206" 50.057,14.325 r90 bottom (schematic designator FU10)
FU10_Out4 "FSMDxxx-1206" "Fuse 1206" 30.057,14.325 r90 bottom (schematic designator FU10)
FU11_Out1 "FSMDxxx-1206" "Fuse 1206" 92.557,26.325 r90 bottom (schematic designator FU11)
FU11_Out2 "FSMDxxx-1206" "Fuse 1206" 72.557,26.325 r90 bottom (schematic designator FU11)
FU11_Out3 "FSMDxxx-1206" "Fuse 1206" 52.557,26.325 r90 bottom (schematic designator FU11)
FU11_Out4 "FSMDxxx-1206" "Fuse 1206" 32.557,26.325 r90 bottom (schematic designator FU11)
FU12_Out1 "FSMDxxx-1206" "Fuse 1206" 95.057,14.325 r90 bottom (schematic designator FU12)
FU12_Out2 "FSMDxxx-1206" "Fuse 1206" 75.057,14.325 r90 bottom (schematic designator FU12)
FU12_Out3 "FSMDxxx-1206" "Fuse 1206" 55.057,14.325 r90 bottom (schematic designator FU12)
FU12_Out4 "FSMDxxx-1206" "Fuse 1206" 35.057,14.325 r90 bottom (schematic designator FU12)
HL1 "LED" "LED 0805" 60.706,54.737 r0 top
HL2 "LED" "LED 0805" 60.706,56.388 r0 top
HL3 "LED" "LED 0805" 60.706,58.039 r0 top
HL4 "LED" "LED 0805" 60.706,59.69 r0 top
L1 "CDRH8D43NP-101NC" CDRH8D43NP-xxxNC 14.478,50.546 r270 top
R1 "10k" "Resistor 0805" 8.128,51.308 r180 top
R2 "2k4" "Resistor 0805" 4.318,51.308 r90 top
R3 "10k" "Resistor 0805" 3.048,58.42 r0 top
R4 "1k" "Resistor 0805" 6.604,58.42 r0 top
R5 "100R" "Resistor 1206" 7.366,17.399 r90 bottom
R6 "10k" "Resistor 0805" 69.342,45.72 r180 bottom
R7_DI1 "200R" "Resistor 0805" 96.568,66.982 r180 bottom (schematic designator R7)
R7_DI2 "200R" "Resistor 0805" 86.154,66.982 r180 bottom (schematic designator R7)
R7_DI3 "200R" "Resistor 0805" 86.154,57.838 r180 bottom (schematic designator R7)
R7_DI4 "200R" "Resistor 0805" 96.568,57.838 r180 bottom (schematic designator R7)
R7_DI5 "200R" "Resistor 0805" 77.264,66.982 r180 bottom (schematic designator R7)
R7_DI6 "200R" "Resistor 0805" 67.358,66.982 r180 bottom (schematic designator R7)
R7_DI7 "200R" "Resistor 0805" 67.358,57.838 r180 bottom (schematic designator R7)
R7_DI8 "200R" "Resistor 0805" 77.264,57.838 r180 bottom (schematic designator R7)
R7_DI9 "200R" "Resistor 0805" 58.468,66.982 r180 bottom (schematic designator R7)
R7_DI10 "200R" "Resistor 0805" 48.308,66.982 r180 bottom (schematic designator R7)
R7_DI11 "200R" "Resistor 0805" 48.308,57.838 r180 bottom (schematic designator R7)
R7_DI12 "200R" "Resistor 0805" 58.468,57.838 r180 bottom (schematic designator R7)
R7_DI13 "200R" "Resistor 0805" 39.474,66.982 r180 bottom (schematic designator R7)
R7_DI14 "200R" "Resistor 0805" 29.766,66.982 r180 bottom (schematic designator R7)
R7_DI15 "200R" "Resistor 0805" 29.766,57.838 r180 bottom (schematic designator R7)
R7_DI16 "200R" "Resistor 0805" 39.418,57.838 r180 bottom (schematic designator R7)
R7_DI17 "200R" "Resistor 0805" 20.622,66.982 r180 bottom (schematic designator R7)
R7_DI18 "200R" "Resistor 0805" 9.954,66.982 r180 bottom (schematic designator R7)
R7_DI19 "200R" "Resistor 0805" 9.954,57.838 r180 bottom (schematic designator R7)
R7_DI20 "200R" "Resistor 0805" 20.622,57.838 r180 bottom (schematic designator R7)
R8_DI1 "2k4" "Resistor 1206" 92.631,64.95 r90 bottom (schematic designator R8)
R8_DI2 "2k4" "Resistor 1206" 82.217,64.95 r90 bottom (schematic designator R8)
R8_DI3 "2k4" "Resistor 1206" 82.217,55.806 r90 bottom (schematic designator R8)
R8_DI4 "2k4" "Resistor 1206" 92.631,55.806 r90 bottom (schematic designator R8)
R8_DI5 "2k4" "Resistor 1206" 73.327,64.95 r90 bottom (schematic designator R8)
R8_DI6 "2k4" "Resistor 1206" 63.421,64.95 r90 bottom (schematic designator R8)
R8_DI7 "2k4" "Resistor 1206" 63.421,55.806 r90 bottom (schematic designator R8)
R8_DI8 "2k4" "Resistor 1206" 73.327,55.806 r90 bottom (schematic designator R8)
R8_DI9 "2k4" "Resistor 1206" 54.531,64.95 r90 bottom (schematic designator R8)
R8_DI10 "2k4" "Resistor 1206" 44.371,64.95 r90 bottom (schematic designator R8)
R8_DI11 "2k4" "Resistor 1206" 44.371,55.806 r90 bottom (schematic designator R8)
R8_DI12 "2k4" "Resistor 1206" 54.531,55.806 r90 bottom (schematic designator R8)
R8_DI13 "2k4" "Resistor 1206" 35.537,64.95 r90 bottom (schematic designator R8)
R8_DI14 "2k4" "Resistor 1206" 25.829,64.95 r90 bottom (schematic designator R8)
R8_DI15 "2k4" "Resistor 1206" 25.829,55.806 r90 bottom (schematic designator R8)
R8_DI16 "2k4" "Resistor 1206" 35.481,55.806 r90 bottom (schematic designator R8)
R8_DI17 "2k4" "Resistor 1206" 16.685,64.95 r90 bottom (schematic designator R8)
R8_DI18 "2k4" "Resistor 1206" 6.017,64.95 r90 bottom (schematic designator R8)
R8_DI19 "2k4" "Resistor 1206" 6.017,55.806 r90 bottom (schematic designator R8)
R8_DI20 "2k4" "Resistor 1206" 16.685,55.806 r90 bottom (schematic designator R8)
R9 "1k" "Resistor 0805" 69.723,54.737 r0 top
R10 "1k" "Resistor 0805" 69.723,56.388 r0 top
R11 "1k" "Resistor 0805" 69.723,58.039 r0 top
R12 "1k" "Resistor 0805" 69.723,59.69 r0 top
VD1 "SS14" "DO-214AC SMA" 3.81,32.004 r270 top
VD2 "SMAJ30CA" "DO-214AC SMA" 10.922,32.004 r270 top
VD3 "SS14" "DO-214AC SMA" 18.506,40.096 r45 top
VD4 "SMAJ10CA" "DO-214AC SMA" 5.842,28.194 r90 bottom
VD5 "SMAJ10CA" "DO-214AC SMA" 9.906,14.986 r180 bottom
VD6_DI1 "SMAJ30CA" "DO-214AC SMA" 90.726,62.283 r0 bottom (schematic designator VD6)
VD6_DI2 "SMAJ30CA" "DO-214AC SMA" 80.312,62.283 r0 bottom (schematic designator VD6)
VD6_DI3 "SMAJ30CA" "DO-214AC SMA" 80.312,53.139 r0 bottom (schematic designator VD6)
VD6_DI4 "SMAJ30CA" "DO-214AC SMA" 90.726,53.139 r0 bottom (schematic designator VD6)
VD6_DI5 "SMAJ30CA" "DO-214AC SMA" 71.422,62.283 r0 bottom (schematic designator VD6)
VD6_DI6 "SMAJ30CA" "DO-214AC SMA" 61.516,62.283 r0 bottom (schematic designator VD6)
VD6_DI7 "SMAJ30CA" "DO-214AC SMA" 61.516,53.139 r0 bottom (schematic designator VD6)
VD6_DI8 "SMAJ30CA" "DO-214AC SMA" 71.422,53.139 r0 bottom (schematic designator VD6)
VD6_DI9 "SMAJ30CA" "DO-214AC SMA" 52.626,62.283 r0 bottom (schematic designator VD6)
VD6_DI10 "SMAJ30CA" "DO-214AC SMA" 42.466,62.283 r0 bottom (schematic designator VD6)
VD6_DI11 "SMAJ30CA" "DO-214AC SMA" 42.466,53.139 r0 bottom (schematic designator VD6)
VD6_DI12 "SMAJ30CA" "DO-214AC SMA" 52.626,53.139 r0 bottom (schematic designator VD6)
VD6_DI13 "SMAJ30CA" "DO-214AC SMA" 33.632,62.283 r0 bottom (schematic designator VD6)
VD6_DI14 "SMAJ30CA" "DO-214AC SMA" 23.924,62.283 r0 bottom (schematic designator VD6)
VD6_DI15 "SMAJ30CA" "DO-214AC SMA" 23.924,53.139 r0 bottom (schematic designator VD6)
VD6_DI16 "SMAJ30CA" "DO-214AC SMA" 33.576,53.139 r0 bottom (schematic designator VD6)
VD6_DI17 "SMAJ30CA" "DO-214AC SMA" 14.78,62.283 r0 bottom (schematic designator VD6)
VD6_DI18 "SMAJ30CA" "DO-214AC SMA" 4.112,62.283 r0 bottom (schematic designator VD6)
VD6_DI19 "SMAJ30CA" "DO-214AC SMA" 4.112,53.139 r0 bottom (schematic designator VD6)
VD6_DI20 "SMAJ30CA" "DO-214AC SMA" 14.78,53.139 r0 bottom (schematic designator VD6)
VD7_Out1 "SMAJ30CA" "DO-214AC SMA" 94.557,35.42 r90 bottom (schematic designator VD7)
VD7_Out2 "SMAJ30CA" "DO-214AC SMA" 74.557,35.42 r90 bottom (schematic designator VD7)
VD7_Out3 "SMAJ30CA" "DO-214AC SMA" 54.557,35.42 r90 bottom (schematic designator VD7)
VD7_Out4 "SMAJ30CA" "DO-214AC SMA" 34.557,35.42 r90 bottom (schematic designator VD7)
XP1 "RJ45 2V 8P8C" "RJ45 2V 8P8C" 92.454,80.078 r180 top
XP2 "RJ45 2V 8P8C" "RJ45 2V 8P8C" 73.454,80.078 r180 top
XP3 "RJ45 2V 8P8C" "RJ45 2V 8P8C" 54.454,80.078 r180 top
XP5 "RJ45 2V 8P8C" "RJ45 2V 8P8C" 35.454,80.078 r180 top
XP6 "KF129A 5,0 2P" "KF129A 5,0 2P" 5,23 r0 top
XP8 "RJ45 2V 8P8C" "RJ45 2V 8P8C" 16.436,80.078 r180 top
XP9 "Pins 1x3" "Pins 1x3" 72.39,50.292 r180 top
XP10 "Pins 1x5" "Pins 1x5" 72.39,47.752 r180 top
XP11_Out1 "KF129A 5,0 2P" "KF129A 5,0 2P" 87.5,23 r0 top (schematic designator XP11)
XP11_Out2 "KF129A 5,0 2P" "KF129A 5,0 2P" 67.5,23 r0 top (schematic designator XP11)
XP11_Out3 "KF129A 5,0 2P" "KF129A 5,0 2P" 47.5,23 r0 top (schematic designator XP11)
XP11_Out4 "KF129A 5,0 2P" "KF129A 5,0 2P" 27.5,23 r0 top (schematic designator XP11)
XP12_Out1 "KF129A 5,0 2P" "KF129A 5,0 2P" 77.5,23 r0 top (schematic designator XP12)
XP12_Out2 "KF129A 5,0 2P" "KF129A 5,0 2P" 57.5,23 r0 top (schematic designator XP12)
XP12_Out3 "KF129A 5,0 2P" "KF129A 5,0 2P" 37.5,23 r0 top (schematic designator XP12)
XP12_Out4 "KF129A 5,0 2P" "KF129A 5,0 2P" 17.5,23 r0 top (schematic designator XP12)

## Footprints (in the part's own frame and the unit in brackets; to place one, negate y for a bottom-side part, rotate by r counter-clockwise, add the part's x,y. Pads: shape width x height; smd on the part's side, far side on the other; paste and mask are expansions set on the pad)
"Cap Ceramic 0805" [mm]
  rect 1x1.25 smd: 1(0,0) 2(2.032,0)
  silkscreen extent 0.89,-0.63 1.14,0.64
"Cap electro d6.3x2.54mm" [mm]
  round 1.6 hole 0.8: 1(0,0) 2(2.54,0)
  silkscreen extent -2.03,-3.3 4.57,3.3
CDRH8D43NP-xxxNC [mm]
  rect 2.5x2.5 smd: 1(0,0) 2(8.128,0)
  silkscreen extent -0.35,-4.06 8.13,4.06
"DO-214AC SMA" [mm]
  rect 2.5x2 smd: 1(5.08,0) 2(0,0)
  silkscreen extent 0,-1.4 5.08,1.4
"Fuse 1206" [mm]
  rect 1.4x1.6 smd: 1(0,0) 2(3.175,0)
  silkscreen extent 1.02,-0.63 2.16,0.64
"KF129A 5,0 2P" [mm]
  round 3 hole 1.6: 1(0,0) 2(2.5,-15) 3(5,0) 4(7.5,-15)
  silkscreen extent -2.5,-20.5 10,2
"LED 0805" [mm]
  rect 1x1.25 smd: 1(0,0) 2(2.032,0)
  silkscreen extent 0.89,-0.51 1.09,0.51
"Pins 1x3" [mm]
  oval 1.6x1.8 hole 1: 1(0,0) 2(2.54,0) 3(5.08,0)
  silkscreen extent -1.27,-1.27 6.35,1.27
"Pins 1x5" [mm]
  oval 1.6x1.8 hole 1: 1(0,0) 2(2.54,0) 3(5.08,0) 4(7.62,0) 5(10.16,0)
  silkscreen extent -1.27,-1.27 11.43,1.27
"Resistor 0805" [mm]
  rect 1x1.25 smd: 1(0,0) 2(2.032,0)
  silkscreen extent 0.89,-0.51 1.14,0.51
"Resistor 1206" [mm]
  rect 1.4x1.6 smd: 1(0,0) 2(3.175,0)
  silkscreen extent 1.02,-0.76 2.16,0.76
"RJ45 2V 8P8C" [mm]
  rrect50% 2x3 hole 1 slot 2 at 90 deg unplated: 0(-4.064,9.144) 0(-4.064,-10.922) 0(-3.429,2.794) 0(12.319,-0.508) 0(12.954,5.08) 0(12.954,-10.922)
  round 3.2 hole 3.2 unplated: 0(-1.27,-6.35) 0(10.16,-6.35)
  round 1.8 hole 1: 1(0,0) 2(1.27,2.54) 3(2.54,0) 4(3.81,2.54) 5(5.08,0) 6(6.35,2.54) 7(7.62,0) 8(8.89,2.54) 11(8.89,9.144) 12(7.62,6.604) 13(6.35,9.144) 14(5.08,6.604) 15(3.81,9.144) 16(2.54,6.604) 17(1.27,9.144) 18(0,6.604)
  silkscreen extent -4.19,-17.27 13.08,11.18
"SO8 S1.27W6.00" [mm]
  rect 2x0.5 smd: 1(0,0) 2(0,-1.27) 3(0,-2.54) 4(0,-3.81) 5(5.969,-3.81) 6(5.969,-2.54) 7(5.969,-1.27) 8(5.969,0)
  silkscreen extent 1.52,-4.45 4.44,0.7
"SO8 S1.27W6.00 GP" [mm]
  rect 2x0.5 smd: 1(0,0) 2(0,-1.27) 3(0,-2.54) 4(0,-3.81) 5(5.969,-3.81) 6(5.969,-2.54) 7(5.969,-1.27) 8(5.969,0)
  rect 3x5 smd: 9(2.997,-1.905)
  rect 2.6x3.1 on Top Solder: 9(2.997,-1.905)
  silkscreen extent 1.52,-4.44 4.45,0.7
"SO16 S1.27W6.00" [mm]
  rect 2x0.5 smd: 1(0,0) 2(0,-1.27) 3(0,-2.54) 4(0,-3.81) 5(0,-5.08) 6(0,-6.35) 7(0,-7.62) 8(0,-8.89) 9(5.969,-8.89) 10(5.969,-7.62) 11(5.969,-6.35) 12(5.969,-5.08) 13(5.969,-3.81) 14(5.969,-2.54) 15(5.969,-1.27) 16(5.969,0)
  silkscreen extent 1.52,-9.6 4.44,0.7
"SO18 S1.27W9.9" [mm]
  rect 2x0.5 smd: 1(0,0) 2(0,-1.27) 3(0,-2.54) 4(0,-3.81) 5(0,-5.08) 6(0,-6.35) 7(0,-7.62) 8(0,-8.89) 9(0,-10.16) 10(9.906,-10.16) 11(9.906,-8.89) 12(9.906,-7.62) 13(9.906,-6.35) 14(9.906,-5.08) 15(9.906,-3.81) 16(9.906,-2.54) 17(9.906,-1.27) 18(9.906,0)
  silkscreen extent 1.4,-10.92 8.51,0.76
SOT-232 [mm]
  rect 1x1.8 smd: 1(0,0) 2(2.286,0) 3(4.572,0)
  rect 3.3x1.8 smd: 2(2.286,6.985)
  silkscreen extent -1.02,1.65 5.59,5.33
"TQFP48 S0.5" [mm]
  rect 1.2x0.25 smd: 1(0,-0.25) 2(0,-0.75) 3(0,-1.25) 4(0,-1.75) 5(0,-2.25) 6(0,-2.75) 7(0,-3.25) 8(0,-3.75) 9(0,-4.25) 10(0,-4.75) 11(0,-5.25) 12(0,-5.75) 25(9,-5.75) 26(9,-5.25) 27(9,-4.75) 28(9,-4.25) 29(9,-3.75) 30(9,-3.25) 31(9,-2.75) 32(9,-2.25) 33(9,-1.75) 34(9,-1.25) 35(9,-0.75) 36(9,-0.25)
  rect 0.25x1.2 smd: 13(1.75,-7.5) 14(2.25,-7.5) 15(2.75,-7.5) 16(3.25,-7.5) 17(3.75,-7.5) 18(4.25,-7.5) 19(4.75,-7.5) 20(5.25,-7.5) 21(5.75,-7.5) 22(6.25,-7.5) 23(6.75,-7.5) 24(7.25,-7.5) 37(7.25,1.5) 38(6.75,1.5) 39(6.25,1.5) 40(5.75,1.5) 41(5.25,1.5) 42(4.75,1.5) 43(4.25,1.5) 44(3.75,1.5) 45(3.25,1.5) 46(2.75,1.5) 47(2.25,1.5) 48(1.75,1.5)
  silkscreen extent 0.2,-6.5 8,1.3

## Part data
C1 C4: library part ECap
C2 C3 C5 C6 C7 C8 C9 C10 C11 C13 C14 C15: library part CerCap
C12_DI1 C12_DI2 C12_DI3 C12_DI4 C12_DI5 C12_DI6 C12_DI7 C12_DI8 C12_DI9 C12_DI10 C12_DI11 C12_DI12 C12_DI13 C12_DI14 C12_DI15 C12_DI16 C12_DI17 C12_DI18 C12_DI19 C12_DI20: library part "Capacitor Nonpolar"
DA2: library part LM1117IMP-x.x
DD2: library part STM32F100C4T6
FU1 FU2 FU3 FU4_DI1 FU4_DI2 FU4_DI3 FU4_DI4 FU4_DI5 FU4_DI6 FU4_DI7 FU4_DI8 FU4_DI9 FU4_DI10 FU4_DI11 FU4_DI12 FU4_DI13 FU4_DI14 FU4_DI15 FU4_DI16 FU4_DI17 FU4_DI18 FU4_DI19 FU4_DI20 FU5_Out1 FU5_Out2 FU5_Out3 FU5_Out4 FU9_Out1 FU9_Out2 FU9_Out3 FU9_Out4: library part FSMDxxx-1206
L1: library part CDRH8D43NP-xxxNC
R1 R2 R3 R4 R6 R7_DI1 R7_DI2 R7_DI3 R7_DI4 R7_DI5 R7_DI6 R7_DI7 R7_DI8 R7_DI9 R7_DI10 R7_DI11 R7_DI12 R7_DI13 R7_DI14 R7_DI15 R7_DI16 R7_DI17 R7_DI18 R7_DI19 R7_DI20 R9 R10 R11 R12: library part "Resistor 0,125W"
R5 R8_DI1 R8_DI2 R8_DI3 R8_DI4 R8_DI5 R8_DI6 R8_DI7 R8_DI8 R8_DI9 R8_DI10 R8_DI11 R8_DI12 R8_DI13 R8_DI14 R8_DI15 R8_DI16 R8_DI17 R8_DI18 R8_DI19 R8_DI20: library part "Resistor 0,25W"
VD2 VD4 VD5 VD6_DI1 VD6_DI2 VD6_DI3 VD6_DI4 VD6_DI5 VD6_DI6 VD6_DI7 VD6_DI8 VD6_DI9 VD6_DI10 VD6_DI11 VD6_DI12 VD6_DI13 VD6_DI14 VD6_DI15 VD6_DI16 VD6_DI17 VD6_DI18 VD6_DI19 VD6_DI20 VD7_Out1 VD7_Out2 VD7_Out3 VD7_Out4: library part SMAJxxCA

## Via types
v1: diameter 1, hole 0.5, Top Layer to Bottom Layer, tented both sides, 81 vias
v2: diameter 0.6, hole 0.3, Top Layer to Bottom Layer, tented both sides, 24 vias
v3: diameter 1.2, hole 0.6, Top Layer to Bottom Layer, tented both sides, 7 vias
v4: diameter 0.8, hole 0.4, Top Layer to Bottom Layer, tented both sides, 5 vias
v5: diameter 1.6, hole 0.8, Top Layer to Bottom Layer, tented both sides, 3 vias
v6: diameter 0.6, hole 0.3, Top Layer to Bottom Layer, 2 vias

## Nets (pads, with @x,y where several pads share a name; then routed paths per layer and width w, separated by ;. In a path a pad name is that pad's centre, name@x,y a point inside that pad or via, vN(x,y) a via of type N, cw(c..) or ccw(c..) an arc to the next point about the centre after c; other vN are vias at no path point)
+3V3: C6.2 C7.2 C8.2 C9.2 C10.2 C13.2 C14.2 DA2.2 DD2.9 DD2.24 DD2.36 DD2.48 DD4_Out1.10 DD4_Out1.16 DD4_Out2.10 DD4_Out2.16 DD4_Out3.10 DD4_Out3.16 DD4_Out4.10 DD4_Out4.16 R6.1 XP9.1 XP10.1 | length 64.8
  Top Layer w0.25: v4(44.45,52.578) 44.175,52.303 42.693,52.303 42.545,52.451 C8.2@42.545,53.213 42.764,53.432 DD2.9@47.066,53.432 ; C9.2@46.99,59.182 DD2.48@48.816,59.182 ; DD2.24@54.316,50.182 56.244,50.182 C7.2@56.388,50.038 ; DD2.36@56.066,57.432 56.066,59.114 C10.2@56.134,59.182
  Top Layer w0.5: v1(19.304,36.576) 19.304,36.83 21.943,39.469 DD4_Out4.16@22.977,39.469 ; DD4_Out4.10@30.597,39.469 30.597,38.548 v1(31.807,37.338) ; v1(37.973,39.497) 38.001,39.469 DD4_Out3.16@42.977,39.469 ; v4(45.974,59.182) C9.2@46.99,59.182 ; DD4_Out3.10@50.597,39.469 50.597,38.548 v1(51.807,37.338) ; C10.2@56.134,59.182 v4(56.134,60.198) ; C7.2@56.388,50.038 v2(57.404,50.038) ; v1(60.377,39.37) 60.476,39.469 DD4_Out2.16@62.977,39.469 ; DD4_Out2.10@70.597,39.469 70.597,38.548 v1(71.807,37.338) ; v1(78.486,39.497) 78.514,39.469 DD4_Out1.16@82.977,39.469 ; DD4_Out1.10@90.597,39.469 90.597,38.548 v1(91.807,37.338)
  Top Layer w1: DA2.2@31.496,52.578 DA2.2@31.496,45.593 35.941,45.593 C6.2@36.068,45.72 37.084,45.72 v3(37.846,46.482)
  Bottom Layer w0.25: R6.1@69.342,45.72 71.628,45.72 72.39,46.482 XP10.1@72.39,47.752 XP9.1@72.39,50.292
+6V3: C4.2 C5.2 C15.2 DA2.3 DD1.8 L1.1 R1.1 | length 52.4
  Top Layer w0.3: R1.1@8.128,51.308 13.716,51.308 L1.1@14.478,50.546
  Top Layer w1: L1.1@14.478,50.546 22.098,50.546 C4.2@22.352,50.292 C5.2@26.924,50.292 28.448,50.292 29.21,51.054 DA2.3@29.21,52.578
  Bottom Layer w0.5: DD1.8@12.7,34.798 11.684,34.798 10.922,35.56 10.922,37.211 8.89,39.243 8.89,41.91 11.176,44.196 11.176,49.022 12.446,50.292 C4.2@22.352,50.292
"A RS485": FU3.1 R5.1 XP1.1 XP1.11 XP2.1 XP2.11 XP3.1 XP3.11 XP5.1 XP5.11 XP6.4 XP8.1 XP8.11 | length 287.8
  Top Layer w0.5: XP8.11@7.546,70.934 7.546,68.019 8.255,67.31 18.288,67.31 ; XP8.1@16.436,80.078 18.288,78.226 18.288,67.31 ; 26.564,67.331 XP5.11@26.564,70.934 ; XP5.1@35.454,80.078 37.338,78.194 37.338,67.31 ; 45.564,67.339 XP3.11@45.564,70.934 ; XP3.1@54.454,80.078 56.134,78.398 56.134,67.31 ; 64.564,67.389 XP2.11@64.564,70.934 ; XP2.1@73.454,80.078 75.057,78.475 75.057,67.31 ; 83.564,67.312 XP1.11@83.564,70.934 ; XP1.1@92.454,80.078 94.234,78.298 94.234,69.088 92.456,67.31 75.057,67.31 ; 18.288,67.31 37.338,67.31 ; 37.338,67.31 56.134,67.31 ; 56.134,67.31 75.057,67.31
  Inner Bottom Layer w0.5: XP6.4@12.5,8 12.5,10.233 10.414,12.319 1.524,12.319 0.55,13.293 0.55,82.169 1.693,83.312 14.986,83.312 16.436,81.862 XP8.1@16.436,80.078
  Bottom Layer w0.5: R5.1@7.366,17.399 7.366,12.7 8.128,11.938 FU3.1@12.446,11.938 12.5,11.884 XP6.4@12.5,8
"B RS485": FU2.1 R5.2 XP1.2 XP1.12 XP2.2 XP2.12 XP3.2 XP3.12 XP5.2 XP5.12 XP6.3 XP8.2 XP8.12 | length 238.4
  Inner Bottom Layer w0.5: XP6.3@10,23 10,20.16 9.271,19.431 2.667,19.431 1.778,20.32 1.778,69.342 5.91,73.474 XP8.12@8.816,73.474 8.816,74.729 9.525,75.438 13.066,75.438 XP8.2@15.166,77.538 16.578,77.538 22.987,83.947 37.973,83.947 ; XP5.12@27.834,73.474 27.834,74.824 28.702,75.692 32.338,75.692 XP5.2@34.184,77.538 35.628,77.538 37.973,79.883 37.973,83.947 ; XP3.12@46.834,73.474 46.834,74.647 47.752,75.565 51.211,75.565 XP3.2@53.184,77.538 54.805,77.538 57.277,80.01 57.277,83.947 ; XP2.12@65.834,73.474 65.834,74.597 66.802,75.565 70.211,75.565 XP2.2@72.184,77.538 73.982,77.538 76.2,79.756 76.2,83.947 ; XP1.12@84.834,73.474 84.834,74.928 85.471,75.565 89.211,75.565 XP1.2@91.184,77.538 92.905,77.538 94.488,79.121 94.488,82.423 92.964,83.947 76.2,83.947 ; 37.973,83.947 57.277,83.947 ; 57.277,83.947 76.2,83.947
  Bottom Layer w0.5: R5.2@7.366,20.574 9.398,20.574 10,21.176 XP6.3@10,23 10,26.322 FU2.1@9.906,26.416
DI_1: FU4_DI1.1 XP1.3 | length 18.1
  Bottom Layer w0.3: XP1.3@89.914,80.078 89.914,75.948 90.424,75.438 92.964,75.438 93.98,74.422 93.98,70.612 92.71,69.342 90.424,69.342 90.091,69.009 FU4_DI1.1@90.091,68.125
DI_2: FU4_DI2.1 XP1.6 | length 13
  Bottom Layer w0.3: FU4_DI2.1@79.677,68.125 79.677,71.295 83.82,75.438 85.344,75.438 86.104,76.198 XP1.6@86.104,77.538
DI_3: FU4_DI3.1 XP1.13 | length 19.7
  Bottom Layer w0.3: FU4_DI3.1@79.677,58.981 79.677,60.119 80.01,60.452 86.868,60.452 87.376,60.96 87.376,68.326 86.104,69.598 XP1.13@86.104,70.934
DI_4: FU4_DI4.1 XP1.16 | length 16.6
  Bottom Layer w0.3: XP1.16@89.914,73.474 89.914,70.102 88.392,68.58 88.392,59.436 88.9,58.928 90.038,58.928 FU4_DI4.1@90.091,58.981
DI_5: FU4_DI5.1 XP2.3 | length 18
  Bottom Layer w0.3: FU4_DI5.1@70.787,68.125 70.787,68.755 71.374,69.342 73.66,69.342 74.676,70.358 74.676,72.9 74.704,72.928 74.704,74.902 74.168,75.438 71.628,75.438 70.914,76.152 XP2.3@70.914,80.078
DI_6: FU4_DI6.1 XP2.6 | length 13.2
  Bottom Layer w0.3: FU4_DI6.1@60.881,68.125 60.881,71.803 64.77,75.692 66.802,75.692 67.104,75.994 XP2.6@67.104,77.538
DI_7: FU4_DI7.1 XP2.13 | length 19.4
  Bottom Layer w0.3: FU4_DI7.1@60.881,58.981 60.881,60.119 61.214,60.452 67.818,60.452 68.326,60.96 68.326,68.326 67.104,69.548 XP2.13@67.104,70.934
DI_8: FU4_DI8.1 XP2.16 | length 17
  Bottom Layer w0.3: FU4_DI8.1@70.787,58.981 69.543,58.981 69.088,59.436 69.088,68.834 69.596,69.342 70.104,69.342 70.914,70.152 XP2.16@70.914,73.474
DI_9: FU4_DI9.1 XP3.3 | length 18.6
  Bottom Layer w0.3: XP3.3@51.914,80.078 51.914,75.848 52.324,75.438 55.118,75.438 56.388,74.168 56.388,70.866 54.864,69.342 52.578,69.342 51.991,68.755 FU4_DI9.1@51.991,68.125
DI_10: FU4_DI10.1 XP3.6 | length 12.9
  Bottom Layer w0.3: FU4_DI10.1@41.831,68.125 41.831,71.295 45.72,75.184 47.244,75.184 48.104,76.044 XP3.6@48.104,77.538
DI_11: FU4_DI11.1 XP3.13 | length 19.5
  Bottom Layer w0.3: FU4_DI11.1@41.831,58.981 41.831,59.611 42.672,60.452 49.022,60.452 49.53,60.96 49.53,67.818 48.104,69.244 XP3.13@48.104,70.934
DI_12: FU4_DI12.1 XP3.16 | length 16.2
  Bottom Layer w0.3: XP3.16@51.914,73.474 51.914,70.202 50.546,68.834 50.546,59.436 51.001,58.981 FU4_DI12.1@51.991,58.981
DI_13: FU4_DI13.1 XP5.3 | length 18.2
  Bottom Layer w0.3: XP5.3@32.914,80.078 32.914,75.798 33.274,75.438 36.322,75.438 37.338,74.422 37.338,71.882 35.052,69.596 33.782,69.596 32.941,68.755 32.941,68.181 FU4_DI13.1@32.997,68.125
DI_14: FU4_DI14.1 XP5.6 | length 12.7
  Bottom Layer w0.3: FU4_DI14.1@23.241,68.199 23.241,72.009 26.67,75.438 28.194,75.438 29.104,76.348 XP5.6@29.104,77.538
DI_15: FU4_DI15.1 XP5.13 | length 19.4
  Bottom Layer w0.3: FU4_DI15.1@23.289,58.981 23.289,59.865 23.876,60.452 30.226,60.452 30.734,60.96 30.734,69.304 XP5.13@29.104,70.934
DI_16: FU4_DI16.1 XP5.16 | length 16.3
  Bottom Layer w0.3: XP5.16@32.914,73.474 32.914,70.252 31.496,68.834 31.496,59.436 31.951,58.981 FU4_DI16.1@32.941,58.981
DI_17: FU4_DI17.1 XP8.3 | length 18.6
  Bottom Layer w0.3: XP8.3@13.896,80.078 13.896,76.274 14.732,75.438 17.526,75.438 18.288,74.676 18.288,70.612 17.272,69.596 14.732,69.596 14.145,68.887 FU4_DI17.1@14.145,68.125
DI_18: FU4_DI18.1 XP8.6 | length 12.1
  Bottom Layer w0.3: FU4_DI18.1@3.429,68.199 3.429,70.881 XP8.6@10.086,77.538
DI_19: FU4_DI19.1 XP8.13 | length 19.5
  Bottom Layer w0.3: FU4_DI19.1@3.477,58.981 3.477,60.119 3.81,60.452 10.414,60.452 11.176,61.214 11.176,67.818 10.086,68.908 XP8.13@10.086,70.934
DI_20: FU4_DI20.1 XP8.16 | length 16.8
  Bottom Layer w0.3: XP8.16@13.896,73.474 13.896,70.284 12.192,68.58 12.192,59.436 12.573,59.055 FU4_DI20.1@14.097,59.055
DI_MCU_1: C12_DI1.1 DD2.42 R7_DI1.2 R8_DI1.1 | length 53.4
  Top Layer w0.25: DD2.42@51.816,59.182 51.816,62.992 53.848,65.024 91.287,65.024 v1(93.52,62.791)
  Bottom Layer w0.5: R8_DI1.1@92.631,64.95 93.52,64.95 ; v1(93.52,62.791) 93.52,64.95 ; R7_DI1.2@94.536,66.982 C12_DI1.1@94.536,64.95 93.52,64.95
DI_MCU_2: C12_DI2.1 DD2.38 R7_DI2.2 R8_DI2.1 | length 37.6
  Top Layer w0.25: DD2.38@53.816,59.182 53.816,60.42 54.345,60.949 55.499,60.949 81.264,60.949 v1(83.106,62.791)
  Bottom Layer w0.5: R8_DI2.1@82.217,64.95 83.106,64.95 ; v1(83.106,62.791) 83.106,64.95 ; R7_DI2.2@84.122,66.982 C12_DI2.1@84.122,64.95 83.106,64.95
DI_MCU_3: C12_DI3.1 DD2.26 R7_DI3.2 R8_DI3.1 | length 33.9
  Top Layer w0.25: DD2.26@56.066,52.432 61.996,52.432 62.289,52.139 65.983,52.139 66.295,52.451 81.872,52.451 81.891,52.432 v1(83.106,53.647)
  Bottom Layer w0.5: R8_DI3.1@82.217,55.806 83.106,55.806 ; v1(83.106,53.647) 83.106,55.806 ; R7_DI3.2@84.122,57.838 C12_DI3.1@84.122,55.806 83.106,55.806
DI_MCU_4: C12_DI4.1 DD2.43 R7_DI4.2 R8_DI4.1 | length 66.7
  Top Layer w0.25: DD2.43@51.316,59.182 51.316,63.762 53.213,65.659 93.218,65.659 94.996,63.881 94.996,55.123 v1(93.52,53.647)
  Bottom Layer w0.5: R8_DI4.1@92.631,55.806 93.52,55.806 ; v1(93.52,53.647) 93.52,55.806 ; R7_DI4.2@94.536,57.838 C12_DI4.1@94.536,55.806 93.52,55.806
DI_MCU_5: C12_DI5.1 DD2.39 R7_DI5.2 R8_DI5.1 | length 29.3
  Top Layer w0.25: DD2.39@53.316,59.182 53.316,60.556 54.159,61.399 72.824,61.399 v1(74.216,62.791)
  Bottom Layer w0.5: R8_DI5.1@73.327,64.95 74.216,64.95 ; v1(74.216,62.791) 74.216,64.95 ; R7_DI5.2@75.232,66.982 C12_DI5.1@75.232,64.95 74.216,64.95
DI_MCU_6: C12_DI6.1 DD2.40 R7_DI6.2 R8_DI6.1 | length 20
  Top Layer w0.25: DD2.40@52.816,59.182 52.816,60.693 53.972,61.849 63.368,61.849 v1(64.31,62.791)
  Bottom Layer w0.5: R8_DI6.1@63.421,64.95 64.31,64.95 ; v1(64.31,62.791) 64.31,64.95 ; R7_DI6.2@65.326,66.982 C12_DI6.1@65.326,64.95 64.31,64.95
DI_MCU_7: C12_DI7.1 DD2.28 R7_DI7.2 R8_DI7.1 | length 14.1
  Top Layer w0.25: DD2.28@56.066,53.432 v1@64.095,53.432
  Bottom Layer w0.5: R8_DI7.1@63.421,55.806 64.31,55.806 ; v1(64.31,53.647) 64.31,55.806 ; R7_DI7.2@65.326,57.838 C12_DI7.1@65.326,55.806 64.31,55.806
DI_MCU_8: C12_DI8.1 DD2.27 R7_DI8.2 R8_DI8.1 | length 24.8
  Top Layer w0.25: DD2.27@56.066,52.932 62.199,52.932 62.542,52.589 65.797,52.589 66.855,53.647 v1(74.216,53.647)
  Bottom Layer w0.5: R8_DI8.1@73.327,55.806 74.216,55.806 ; v1(74.216,53.647) 74.216,55.806 ; R7_DI8.2@75.232,57.838 C12_DI8.1@75.232,55.806 74.216,55.806
DI_MCU_9: C12_DI9.1 DD2.41 R7_DI9.2 R8_DI9.1 | length 11.7
  Top Layer w0.25: DD2.41@52.316,59.182 52.316,60.952 54.155,62.791 v1(55.42,62.791)
  Bottom Layer w0.5: R8_DI9.1@54.531,64.95 55.42,64.95 ; v1(55.42,62.791) 55.42,64.95 ; R7_DI9.2@56.436,66.982 C12_DI9.1@56.436,64.95 55.42,64.95
DI_MCU_10: C12_DI10.1 DD2.2 R7_DI10.2 R8_DI10.1 | length 13.9
  Top Layer w0.25: v1(45.26,62.791) 44.577,62.108 44.577,58.42 46.065,56.932 DD2.2@47.066,56.932
  Bottom Layer w0.5: R8_DI10.1@44.371,64.95 45.26,64.95 ; v1(45.26,62.791) 45.26,64.95 ; R7_DI10.2@46.276,66.982 C12_DI10.1@46.276,64.95 45.26,64.95
DI_MCU_11: C12_DI11.1 DD2.10 R7_DI11.2 R8_DI11.1 | length 9.4
  Top Layer w0.25: v2(45.466,52.578) 45.82,52.932 DD2.10@47.066,52.932
  Bottom Layer w0.5: R8_DI11.1@44.371,55.806 45.72,55.806 ; v2(45.466,52.578) 45.466,54.536 44.958,55.044 45.72,55.806 ; R7_DI11.2@46.276,57.838 C12_DI11.1@46.276,55.806 45.72,55.806
DI_MCU_12: C12_DI12.1 DD2.19 R7_DI12.2 R8_DI12.1 | length 15.9
  Top Layer w0.25: v2(50.602,51.562) 51.562,51.562 51.816,51.308 DD2.19@51.816,50.182
  Bottom Layer w0.25: v2(50.602,51.562) 51.11,51.054 54.864,51.054 55.484,51.674 55.484,55.806
  Bottom Layer w0.5: R8_DI12.1@54.531,55.806 55.484,55.806 C12_DI12.1@56.436,55.806 R7_DI12.2@56.436,57.838
DI_MCU_13: C12_DI13.1 DD2.3 R7_DI13.2 R8_DI13.1 | length 20.9
  Top Layer w0.25: v1(36.426,62.791) 36.426,60.094 37.813,58.707 43.407,58.707 45.682,56.432 DD2.3@47.066,56.432
  Bottom Layer w0.5: R8_DI13.1@35.537,64.95 36.426,64.95 ; v1(36.426,62.791) 36.426,64.95 ; R7_DI13.2@37.442,66.982 C12_DI13.1@37.442,64.95 36.426,64.95